# Altium PCB Mixed Signal Board.PcbDoc (part 1 of 3)
Units mm, origin at the board's own origin, x right, y up, seen from the top; angles counter-clockwise.
Board outline 75 x 70 mm, 4 copper layers (Top Layer, GND, VCC, Bottom Layer), stack 1.565 mm thick; 188 components, 143 nets, 738 pads, 413 vias.
Unrouted connection lines stored in the file: 2.
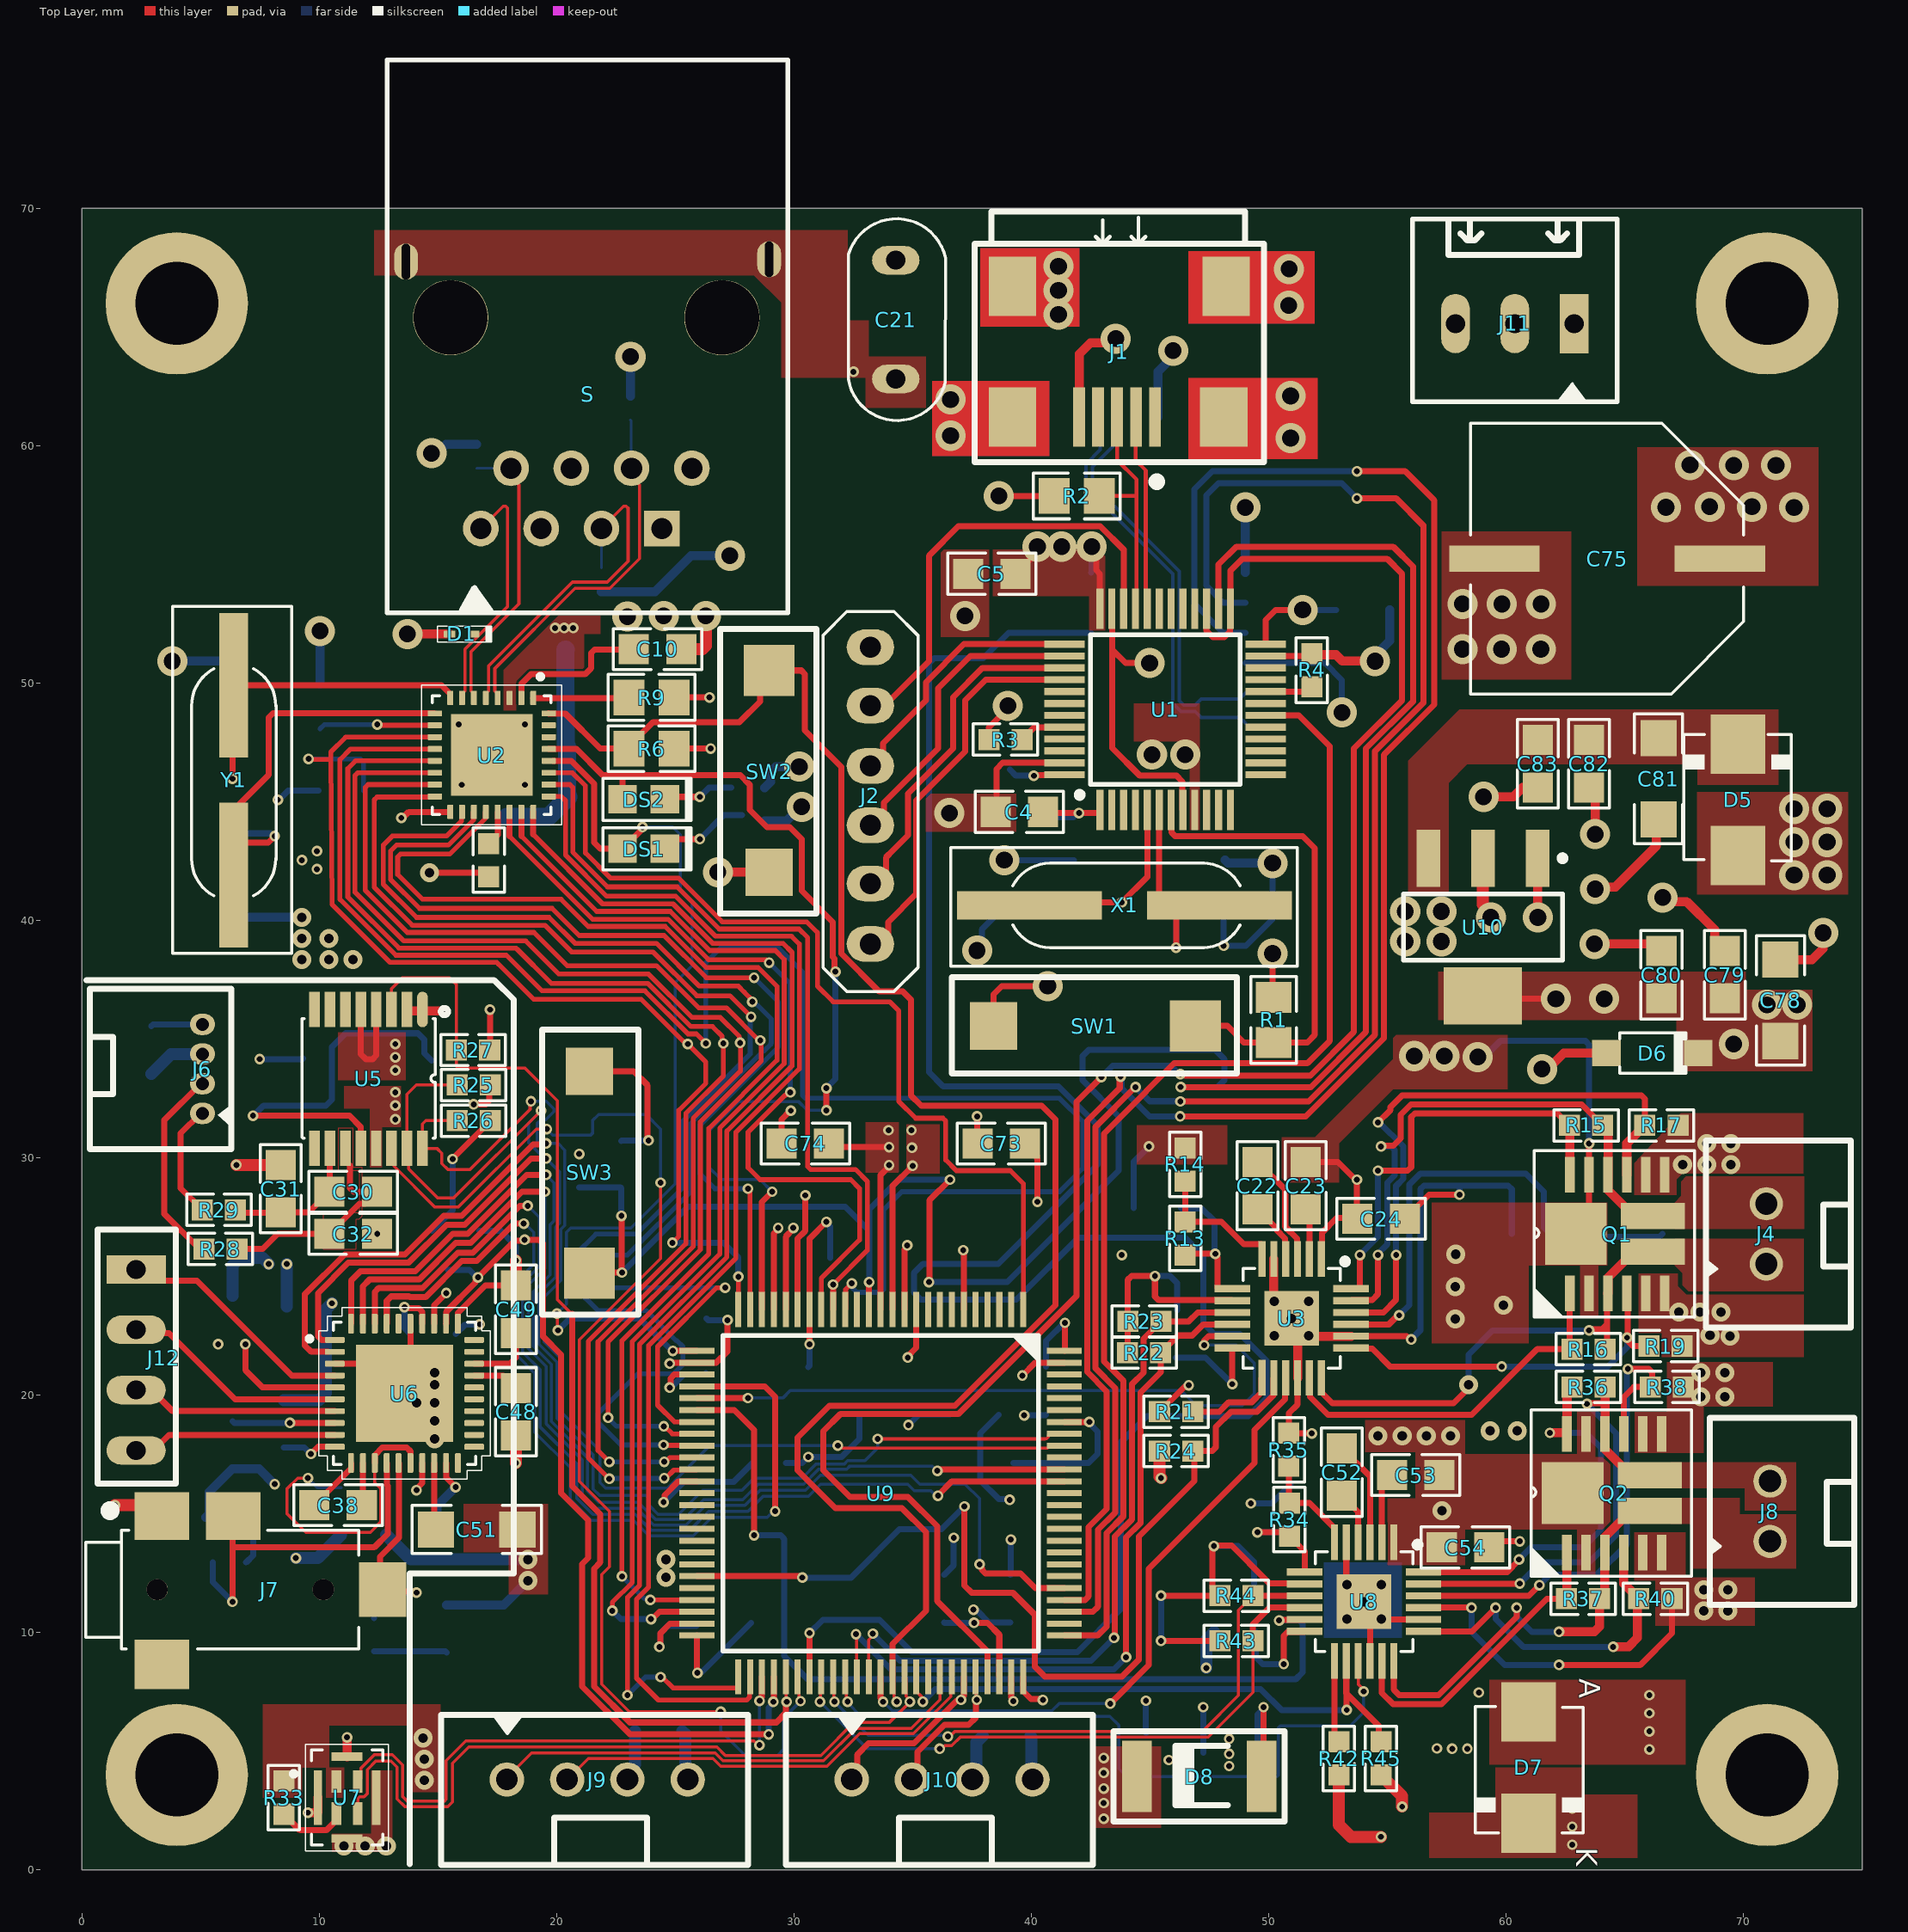
[diagram p0: Top Layer view]
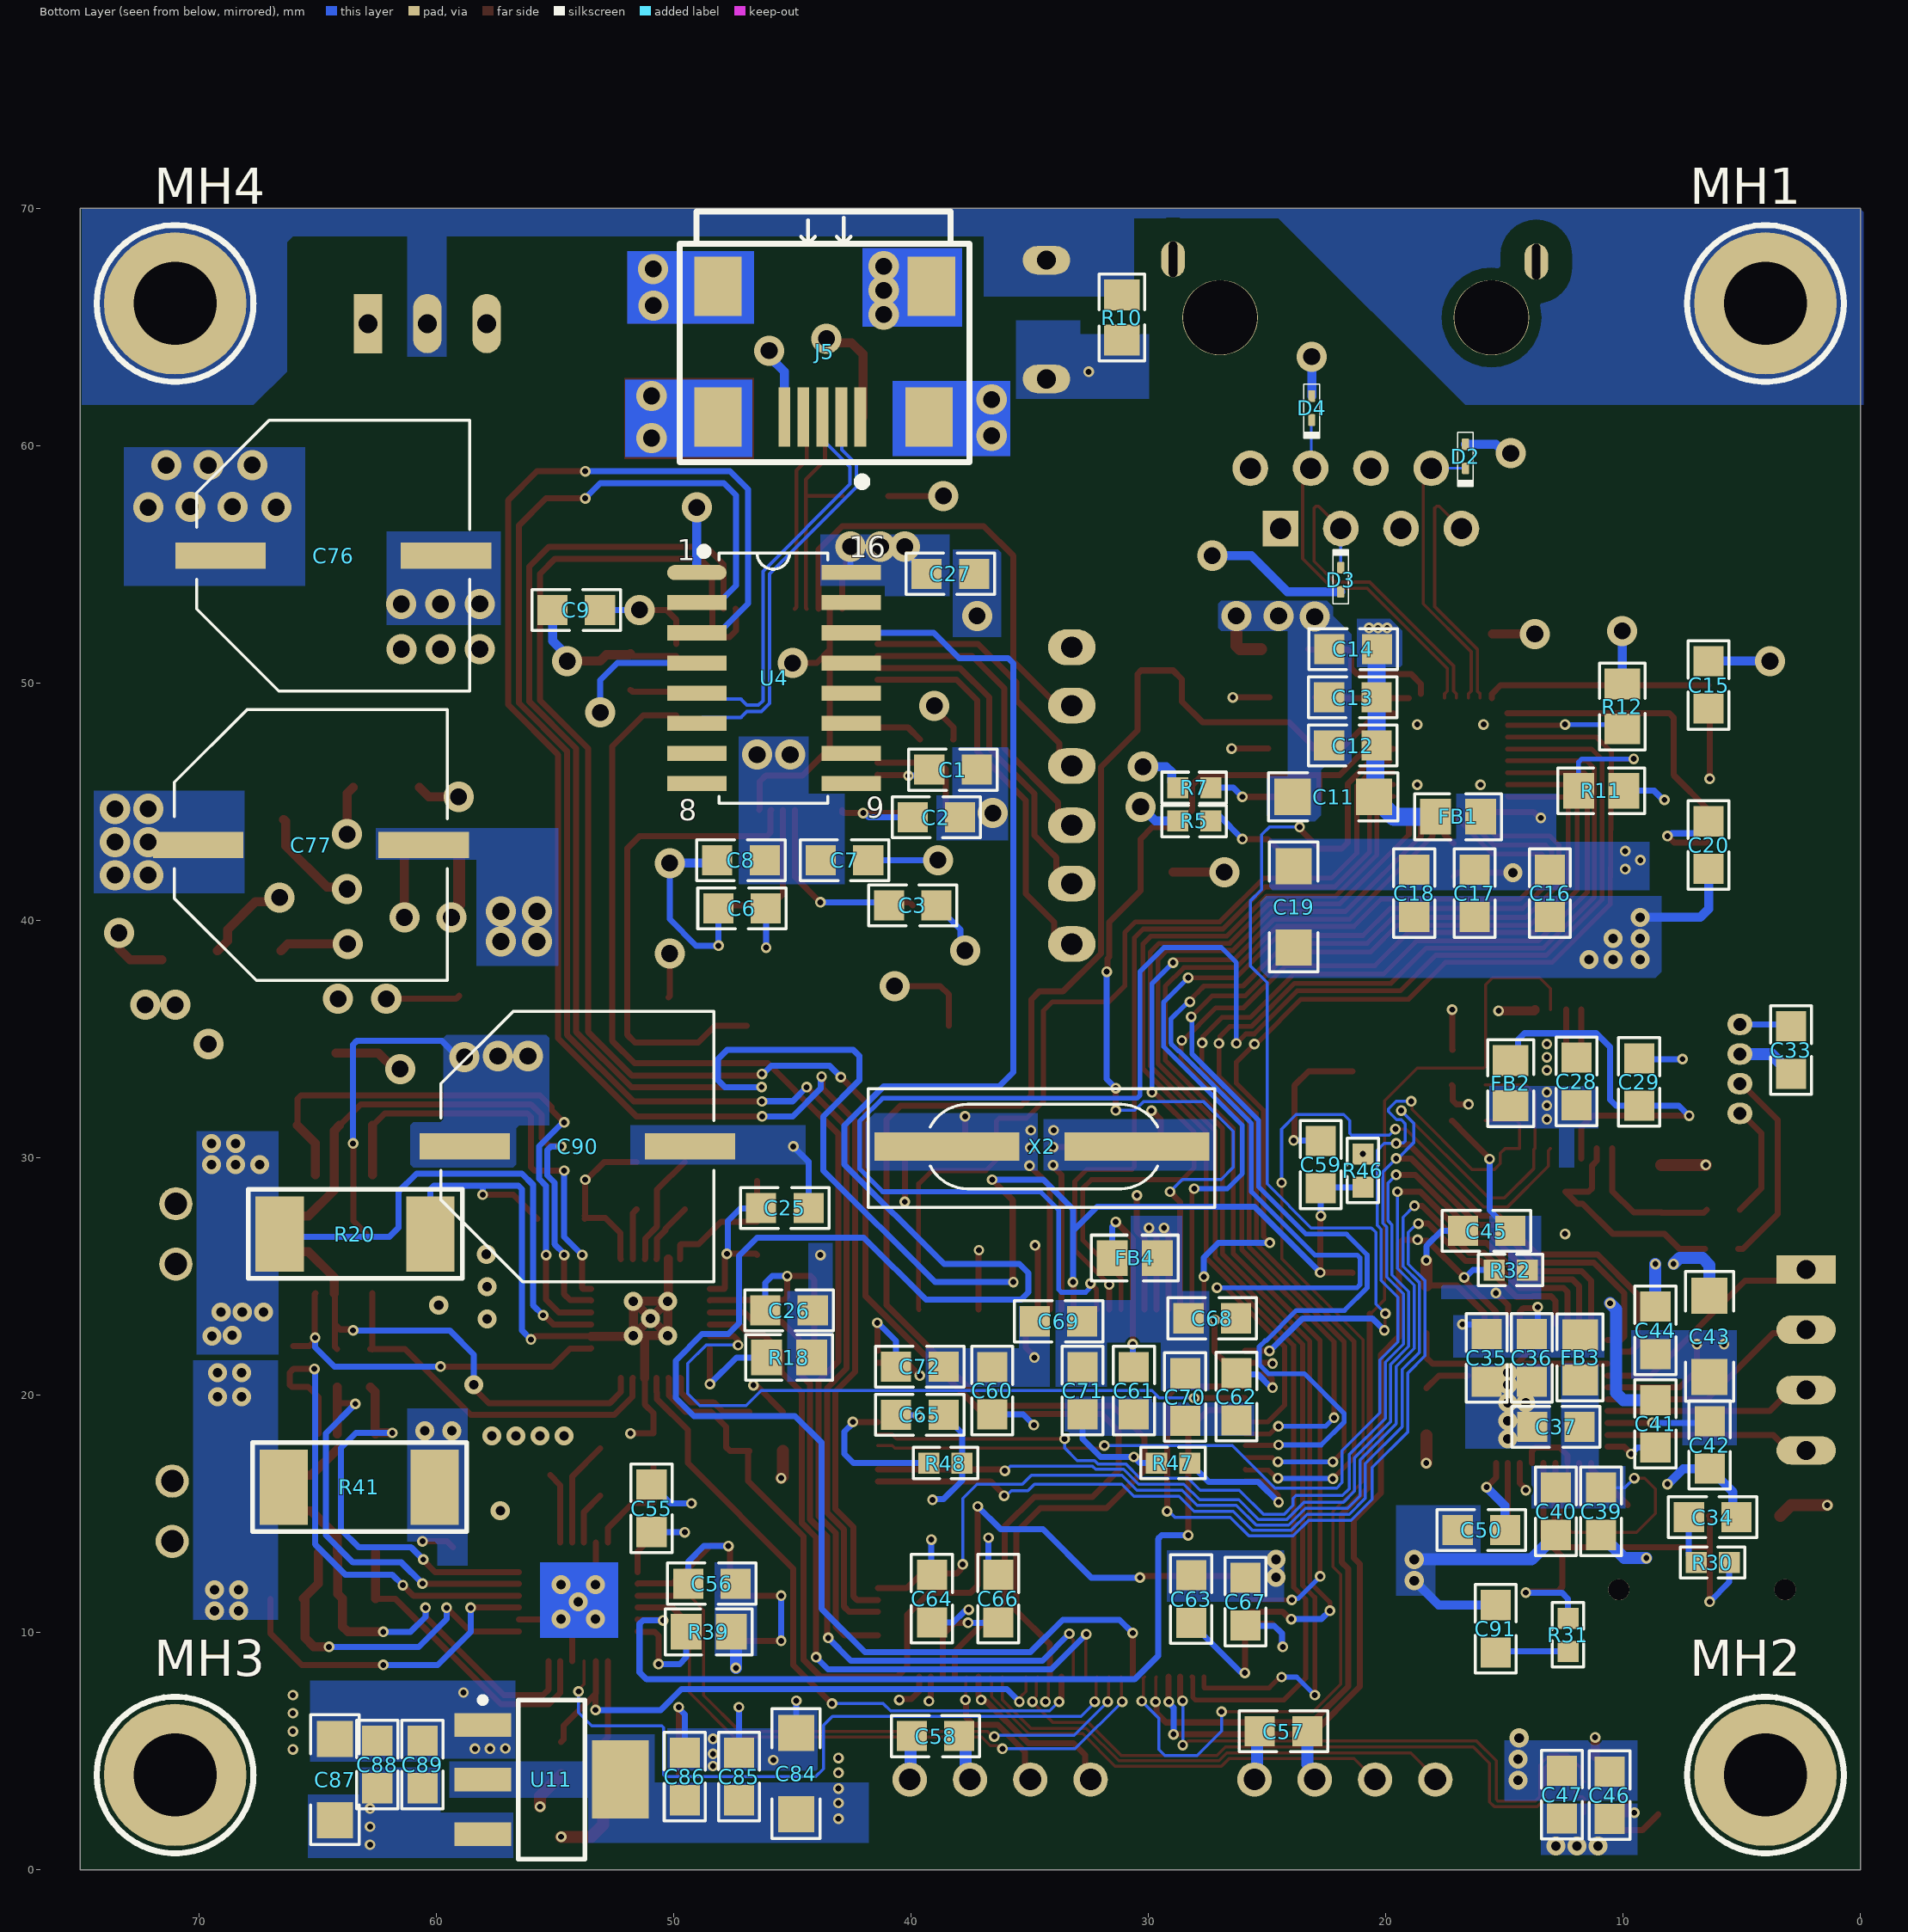
[diagram p1: Bottom Layer view, seen from below]
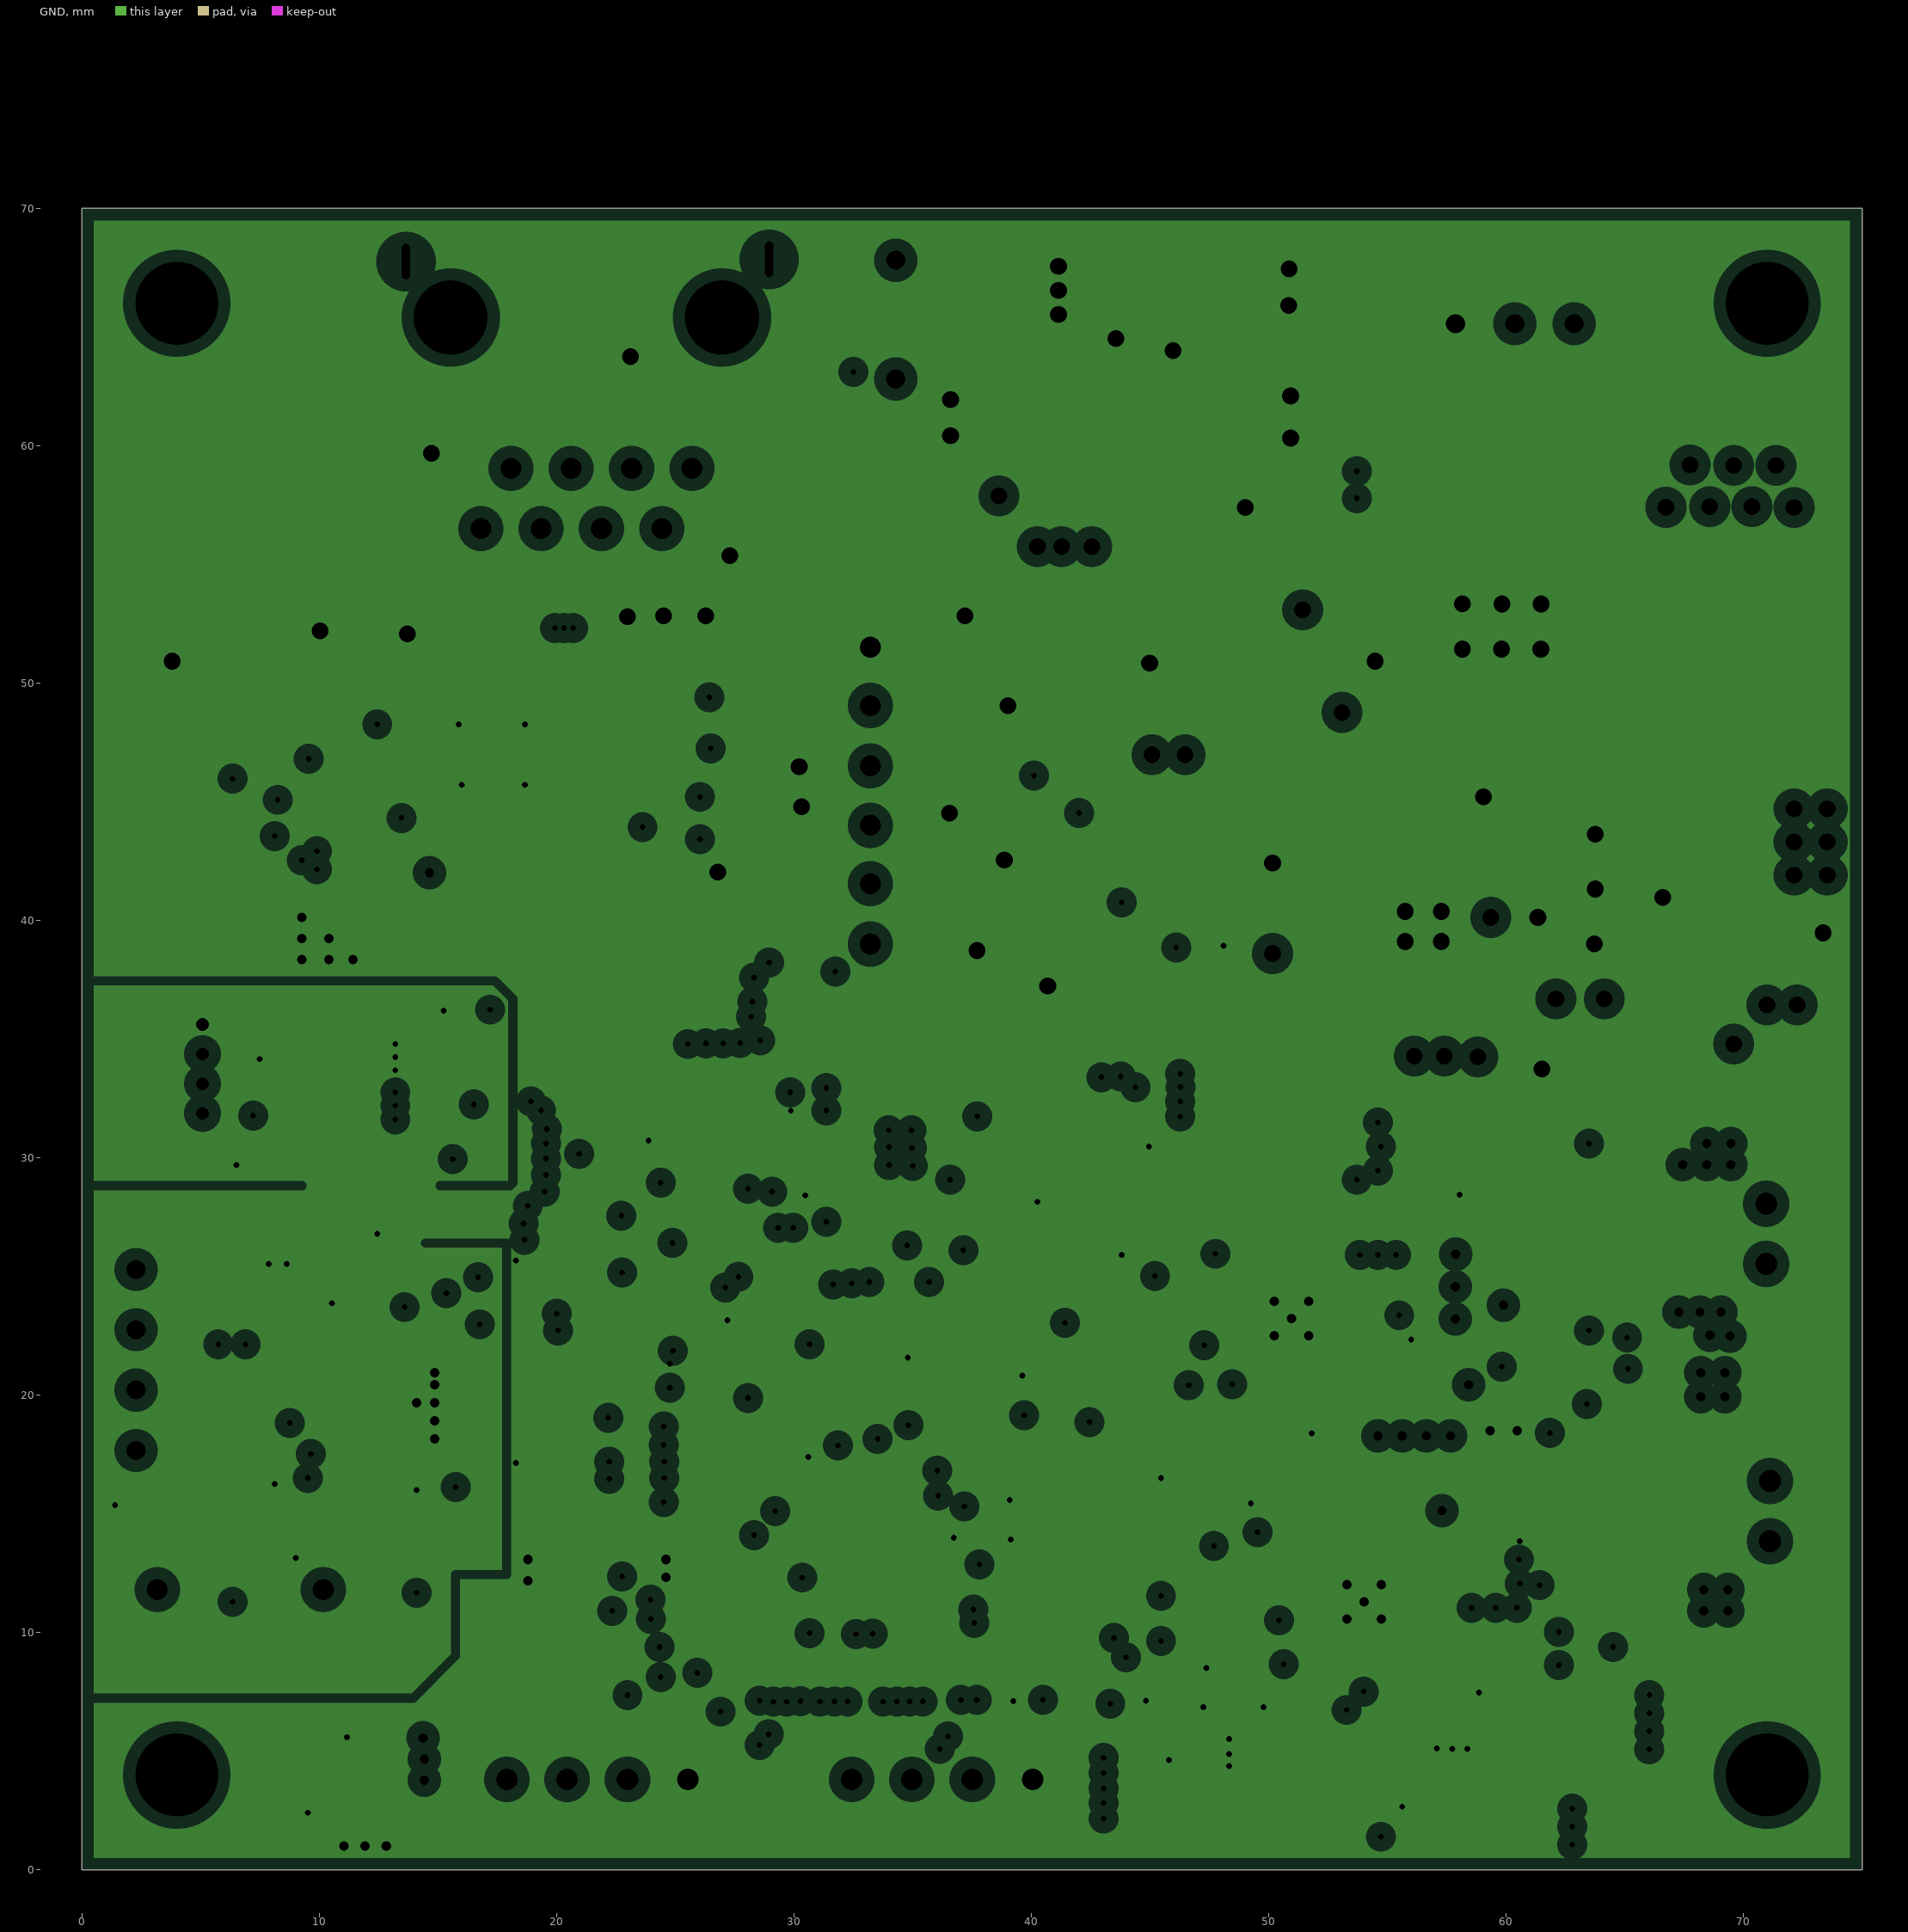
[diagram p2: GND, clearances drawn from the general rule]
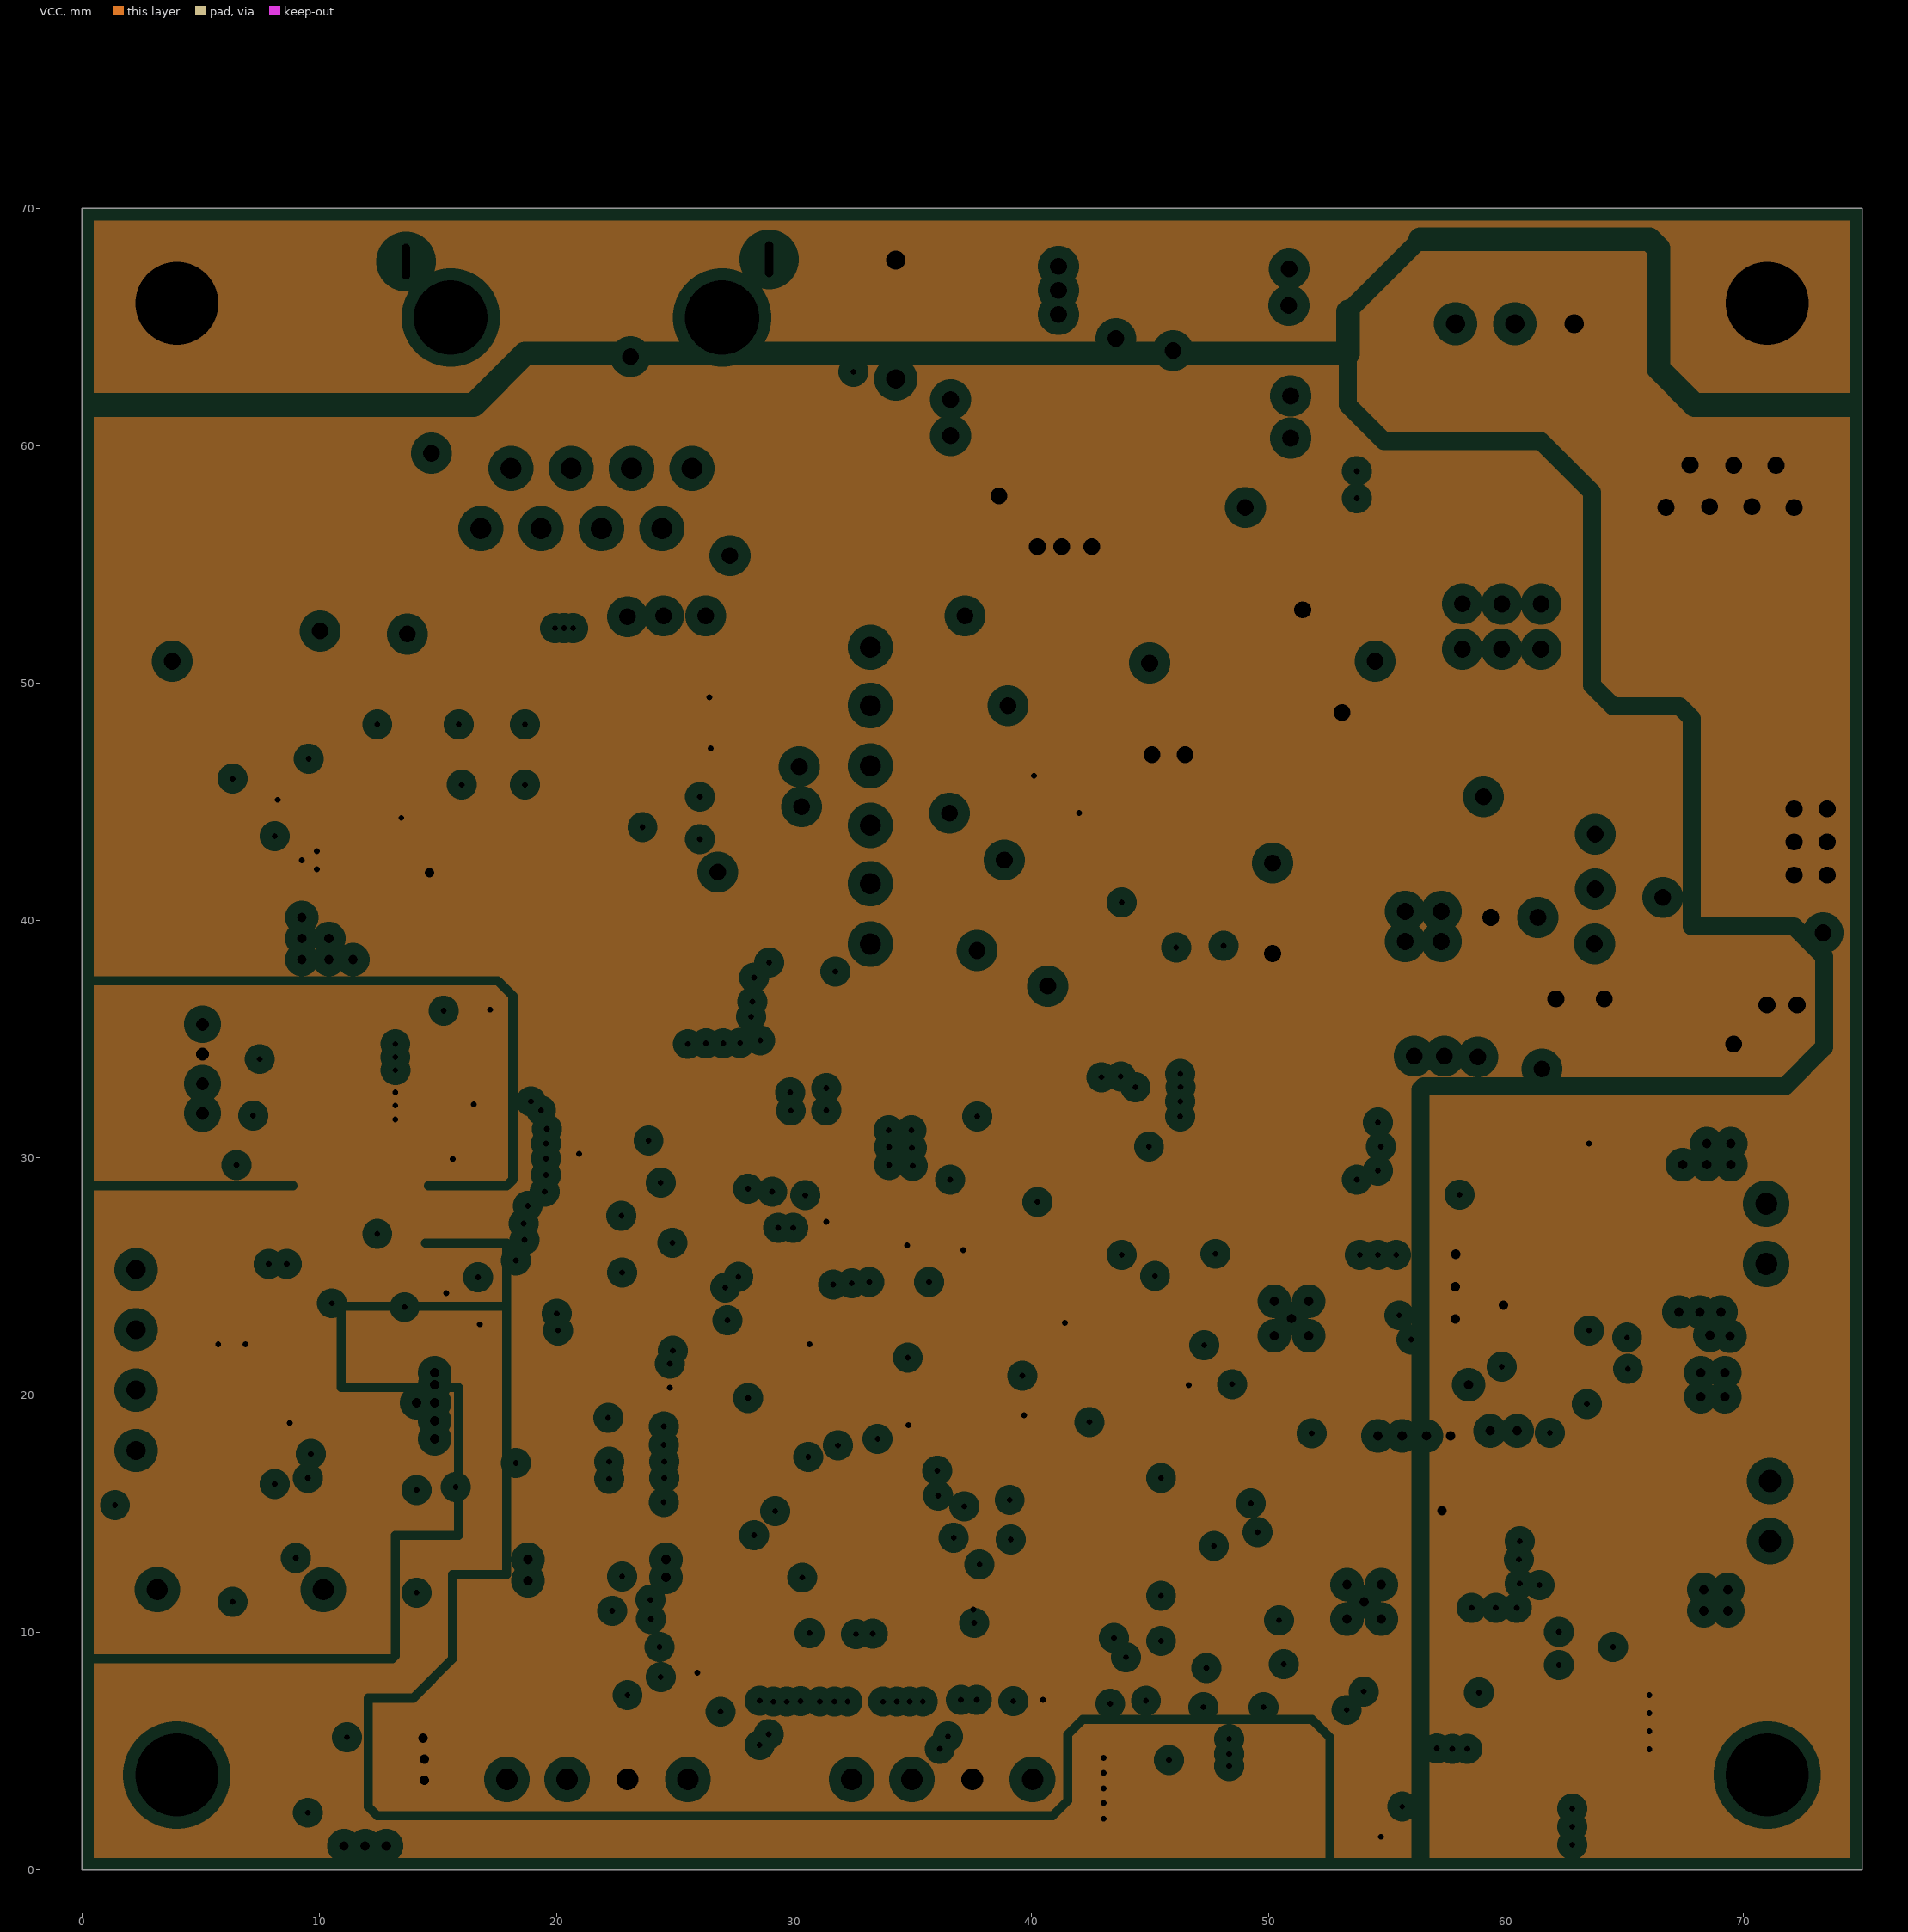
[diagram p3: VCC, clearances drawn from the general rule]
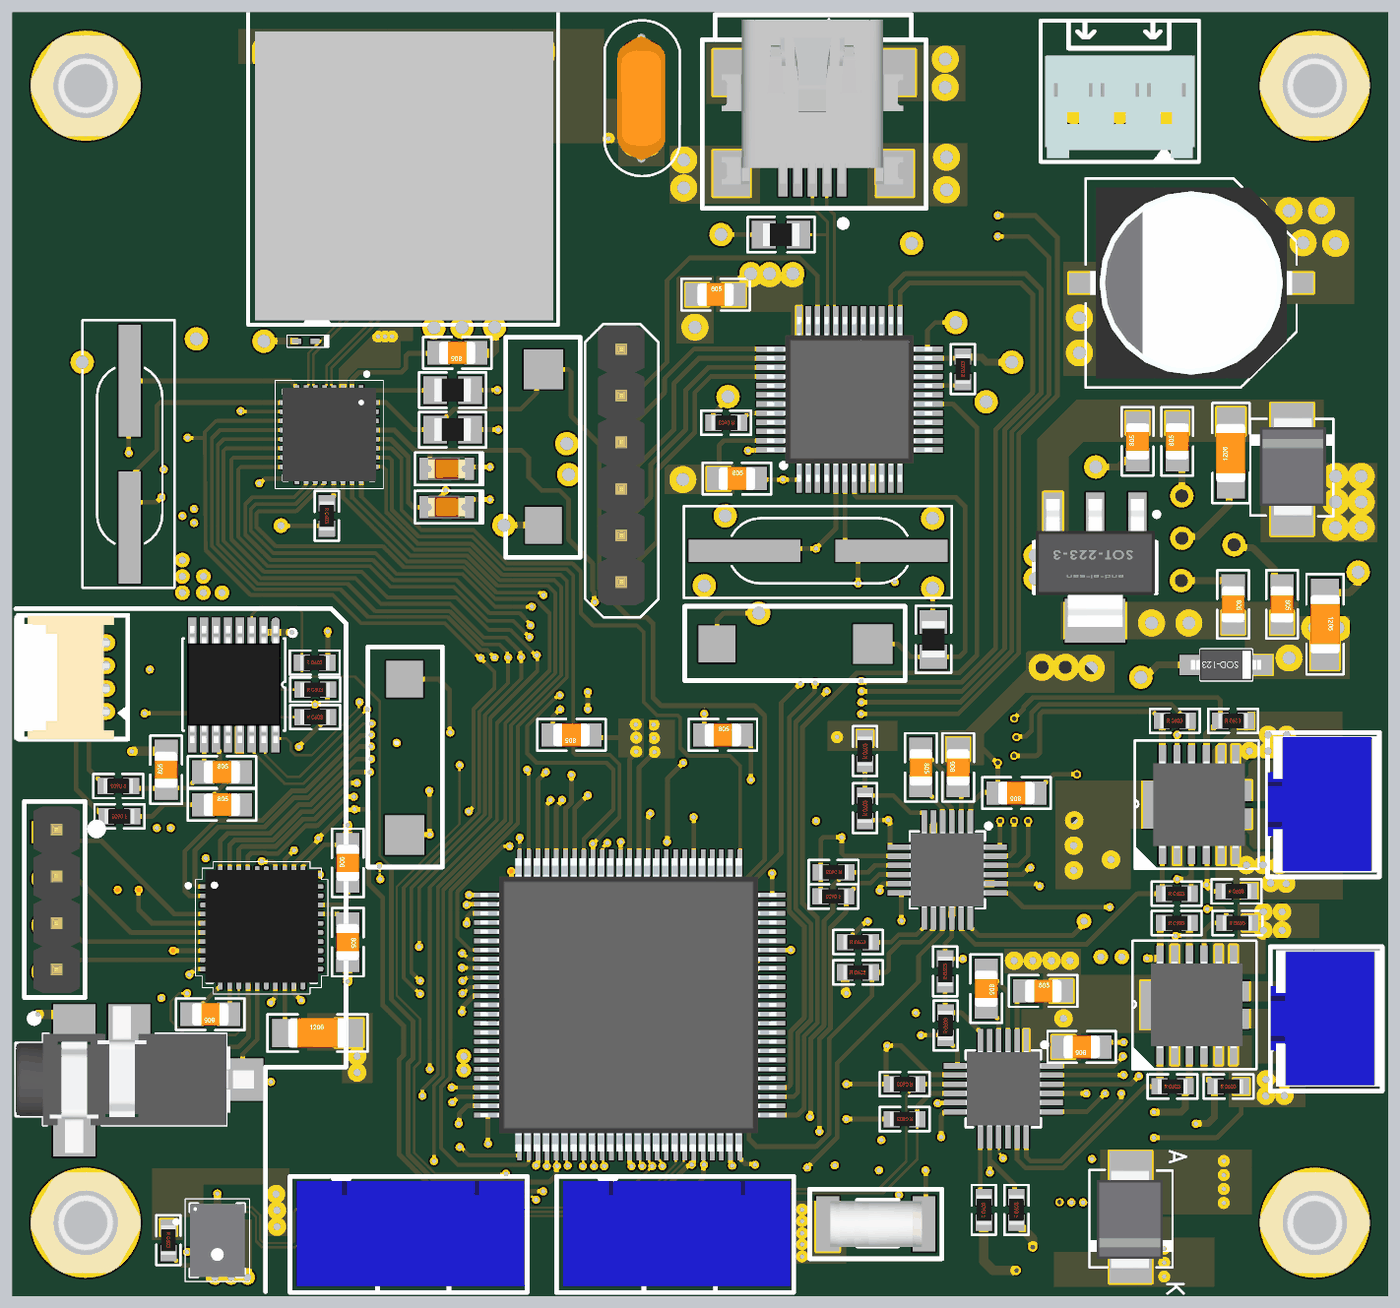
[diagram p6: 3D render of the assembled board from above, using the file's embedded part models]
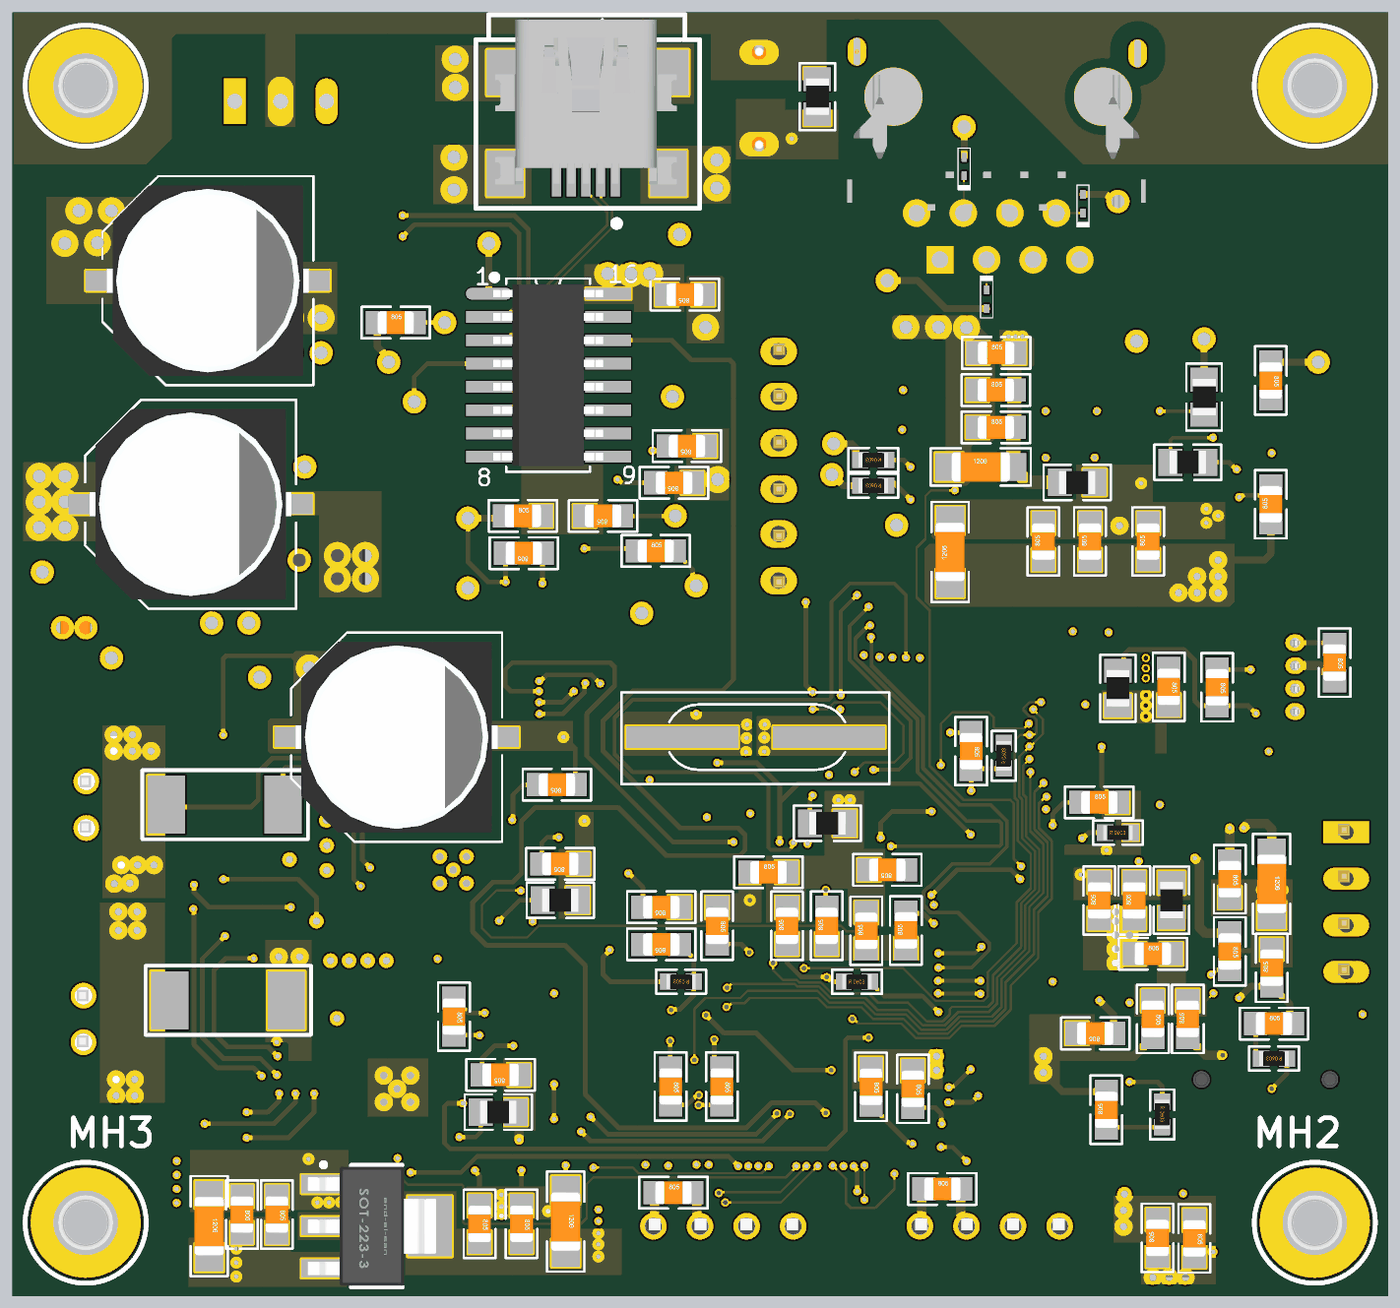
[diagram p7: 3D render of the assembled board from below, using the file's embedded part models]

## Layer stack, top to bottom
Top Solder: solder mask 0.01, Solder Resist, Dk 3.5
Top Layer: signal copper 0.035
Dielectric 2: prepreg 0.1, PP-006, Dk 4.1
GND: plane copper 0.0175, net GND
Dielectric 3: prepreg 1.26, PP-006, Dk 4.1
VCC: plane copper 0.0175, net (Multiple Nets)
Dielectric 1: dielectric 0.1, FR-4, Dk 4.8
Bottom Layer: signal copper 0.035
Bottom Solder: solder mask 0.01, Solder Resist, Dk 3.5

## Board outline
0,70 0,0 75,0 75,70

## Design rules (kind name [scope] priority, off if disabled: settings)
Clearance Clearance_1 [InNet('EARTH') vs InNet('NetC21_2')] p1: gap=1 ignorepadtopadclearanceinfootprint=TRUE
Clearance [InNet('EARTH')] p2: gap=0.5 ignorepadtopadclearanceinfootprint=TRUE
ComponentClearance [All] p1: gap=0.01 collisioncheckmode=3 verticalgap=0.254 showdistances=FALSE
DiffPairsRouting DIFF90 [InDifferentialPairClass('DIFF90')] p1: maxlimit=0.128 minlimit=0.127 mostfreqgap=0.128 toplayer_maxgap=0.127 toplayer_prefgap=0.127 toplayer_minwidth=0.166 toplayer_maxwidth=0.166 toplayer_prefwidth=0.166 bottomlayer_mingap=0.128 bottomlayer_minwidth=0.146 bottomlayer_maxwidth=0.146 bottomlayer_prefwidth=0.146 impedanceprofiledriven=TRUE impedanceprofileid={545CED99-617E-461D-8C4D-E1082A2E9AEE} impedanceprofilevalue=90.000000 maxuncoupledlength=12.7
DiffPairsRouting DIFF100 [InDifferentialPairClass('DIF100')] p2: maxlimit=0.127 minlimit=0.127 mostfreqgap=0.127 toplayer_mingap=0.127 toplayer_minwidth=0.132 toplayer_maxwidth=0.132 toplayer_prefwidth=0.132 bottomlayer_maxgap=0.127 bottomlayer_prefgap=0.127 bottomlayer_minwidth=0.114 bottomlayer_maxwidth=0.114 bottomlayer_prefwidth=0.114 impedanceprofiledriven=TRUE impedanceprofileid={5D373B4F-E4FB-4435-9ADF-C6DEE20937A4} impedanceprofilevalue=100.000000 maxuncoupledlength=12.7
PlaneClearance [All] p1: clearance=0.508
PlaneConnect [All] p1: planeconnectstyle=Relief reliefexpansion=0.508 reliefentries=4 reliefconductorwidth=0.254 reliefairgap=0.254
PolygonConnect [All] p1: connectstyle=Direct reliefconductorwidth=0.254 reliefentries=4 polygonreliefangle="90 Angle" airgapwidth=0.254
RoutingVias [All] p1: holewidth=0.711 width=1.27 viastyle="Through Hole" minholewidth=0.25 minwidth=0.45 maxholewidth=0.711 maxwidth=1.27
SolderMaskExpansion [All] p1: expansion=0.102 istentingtop=FALSE
SupplyNets "Schematic Supply Nets_7" [InNet('GND')] p1: voltage=0.000
SupplyNets "Schematic Supply Nets_6" [InNet('+1V8')] p2: voltage=0.000
SupplyNets "Schematic Supply Nets_5" [InNet('+3V3')] p3: voltage=0.000
SupplyNets "Schematic Supply Nets_4" [InNet('DVDD')] p4: voltage=0.000
SupplyNets "Schematic Supply Nets_3" [InNet('+12V')] p5: voltage=0.000
SupplyNets "Schematic Supply Nets_1" [InNet('EARTH')] p6: voltage=0.000
SupplyNets "Schematic Supply Nets" [InNet('DVDD_2')] p7: voltage=0.000
Width [All] p1: maxlimit=5 minlimit=0.1 preferedwidth=0.254 minimp=50.000000 maximp=50.000000 favimp=50.000000
26 further rules are at their usual default settings.

## Classes and differential pairs
net class OSC_Nets: NetC73_1 NetC74_1 NetU9_8
differential pair class DIFF90: CH340USB_D USBD
differential pair class DIF100: RD TD
net class 50OHM: COL CRS INT MDC MDIO RX_CLK RX_D0 RX_D1 RX_D2 RX_D3 RX_DV RX_ER TX_CLK TX_D0 TX_D1 TX_D2 TX_D3 TX_EN
component class "UART to TTL": C27 J5 U4
component class STM32F407: C57 C58 C59 C60 C61 C62 C63 C64 C65 C66 C67 C68 C69 C70 C71 C72 C73 C74 FB4 J9 J10 R46 R47 R48 SW3 U9 X2
component class STM32F103: C1 C2 C3 C4 C5 C6 C7 C8 C9 J1 J2 R1 R2 R3 R4 SW1 U1 X1
component class "Power and Regulator": C75 C76 C77 C78 C79 C80 C81 C82 C83 C84 C85 C86 C87 C88 C89 D5 D6 D7 J11 MH1 MH2 MH3 MH4 U10 U11
component class "Motor Driver": C22 C23 C24 C25 C26 C90 J4 Q1 R13 R14 R15 R16 R17 R18 R19 R20 R21 R22 R23 R24 U3
component class "Motor Driver_2": C52 C53 C54 C55 C56 J8 Q2 R34 R35 R36 R37 R38 R39 R40 R41 R42 R43 R44 R45 U8
component class "Ethernet PHY": C10 C11 C12 C13 C14 C15 C16 C17 C18 C19 C20 C21 D1 D2 D3 D4 DS1 DS2 FB1 R5 R6 R7 R9 R10 R11 R12 SW2 U2 Y1
component class DAC_MIC: C34 C35 C36 C37 C38 C39 C40 C41 C42 C43 C44 C45 C46 C47 C48 C49 C50 C51 C91 FB3 J7 J12 R30 R31 R32 R33 U6 U7
component class ADC: C28 C29 C30 C31 C32 C33 FB2 J6 R25 R26 R27 R28 R29 U5
differential pair USBD: +USBD_P -USBD_N
differential pair TD: +TD_P -TD_N
differential pair RD: +RD_P -RD_N
differential pair CH340USB_D: +CH340USB_D_P -CH340USB_D_N

## Components (designator, comment, footprint, x,y, rotation, side; value= is the part's Value field where it differs from the comment)
C1 "4.7uF" CAP_0805 38.227,46.355 r0 bottom
C2 "0.1uF" CAP_0805 38.929,44.348 r0 bottom
C3 "30pF" CAP_0805 39.925,40.64 r180 bottom
C4 "0.1uF" CAP_0805 39.497,44.577 r0 top
C5 "0.1uF" CAP_0805 38.338,54.61 r0 top
C6 "30pF" CAP_0805 47.117,40.513 r0 bottom
C7 "1uF" CAP_0805 42.799,42.545 r0 bottom
C8 "10nF" CAP_0805 47.163,42.545 r180 bottom
C9 "0.1uF" CAP_0805 54.102,53.086 r180 bottom
C10 "2nF" CAP_0805 24.257,51.435 r180 top
C11 "10uF" CAP_1206 22.209,45.217 r180 bottom
C12 "1uF" CAP_0805 21.383,47.371 r180 bottom
C13 "0.1uF" CAP_0805 21.383,49.403 r180 bottom
C14 "10nF" CAP_0805 21.367,51.435 r180 bottom
C15 "20pF" CAP_0805 6.397,49.927 r270 bottom
C16 "10nF" CAP_0805 13.081,41.148 r90 bottom
C17 "0.1uF" CAP_0805 16.256,41.148 r90 bottom
C18 "1uF" CAP_0805 18.796,41.148 r90 bottom
C19 "10uF" CAP_1206 23.881,40.576 r90 bottom
C20 "20pF" CAP_0805 6.397,43.18 r90 bottom
C21 "10nF" CAP_P196_102X287_H332_RAD_TH 34.29,67.818 r270 top
C22 "0.1uF" CAP_0805 49.53,28.829 r270 top
C23 "1uF" CAP_0805 51.562,28.829 r90 top
C24 "0.1uF" CAP_0805 54.737,27.432 r180 top
C25 "1uF" CAP_0805 45.314,27.889 r0 bottom
C26 "1uF" CAP_0805 45.136,23.571 r0 bottom
C27 "0.1uF" CAP_0805 38.338,54.61 r0 bottom
C28 "0.1uF" CAP_0805 11.963,33.223 r270 bottom
C29 "0.1uF" CAP_0805 9.322,33.198 r270 bottom
C30 "0.1uF" CAP_0805 11.43,28.575 r0 top
C31 "10nF" CAP_0805 8.382,28.702 r90 top
C32 "10nF" CAP_0805 11.43,26.797 r0 top
C33 "0.1uF" CAP_0805 2.921,34.544 r270 bottom
C34 "22nF" CAP_0805 6.223,14.859 r180 bottom
C35 "1uF" CAP_0805 15.748,21.574 r90 bottom
C36 "0.1uF" CAP_0805 13.843,21.574 r90 bottom
C37 "0.1uF" CAP_0805 12.827,18.669 r180 bottom
C38 "1uF" CAP_0805 10.795,15.367 r180 top
C39 "0.1uF" CAP_0805 10.922,15.113 r90 bottom
C40 "1uF" CAP_0805 12.827,15.113 r270 bottom
C41 "1uF" CAP_0805 8.636,18.796 r270 bottom
C42 "0.1uF" CAP_0805 6.35,17.907 r90 bottom
C43 "10uF" CAP_1206 6.35,22.479 r270 bottom
C44 "0.1uF" CAP_0805 8.636,22.733 r270 bottom
C45 "0.1uF" CAP_0805 15.748,26.924 r180 bottom
C46 "1uF" CAP_0805 10.566,3.15 r270 bottom
C47 "0.1uF" CAP_0805 12.573,3.175 r90 bottom
C48 "150pF" CAP_0805 18.288,19.304 r270 top
C49 "150pF" CAP_0805 18.288,23.622 r90 top
C50 "1uF" CAP_0805 15.967,14.326 r0 bottom
C51 "10uF" CAP_1206 16.637,14.351 r0 top
C52 "0.1uF" CAP_0805 53.086,16.764 r270 top
C53 "1uF" CAP_0805 56.197,16.637 r0 top
C54 "0.1uF" CAP_0805 58.293,13.589 r180 top
C55 "1uF" CAP_0805 50.927,15.24 r270 bottom
C56 "1uF" CAP_0805 48.387,12.065 r0 bottom
C57 "0.1uF" CAP_0805 24.304,5.842 r180 bottom
C58 "0.1uF" CAP_0805 38.964,5.639 r180 bottom
C59 "0.1uF" CAP_0805 22.733,29.718 r270 bottom
C60 "4.7uF" CAP_0805 36.576,20.193 r270 bottom
C61 "0.1uF" CAP_0805 30.607,20.193 r90 bottom
C62 "0.1uF" CAP_0805 26.289,19.939 r90 bottom
C63 "0.1uF" CAP_0805 28.194,11.414 r270 bottom
C64 "0.1uF" CAP_0805 39.116,11.43 r270 bottom
C65 "0.1uF" CAP_0805 39.624,19.177 r0 bottom
C66 "2.2uF" CAP_0805 36.322,11.43 r270 bottom
C67 "2.2uF" CAP_0805 25.908,11.303 r270 bottom
C68 "1uF" CAP_0805 27.305,23.241 r0 bottom
C69 "1uF" CAP_0805 33.782,23.114 r180 bottom
C70 "0.1uF" CAP_0805 28.448,19.923 r90 bottom
C71 "0.1uF" CAP_0805 32.766,20.193 r90 bottom
C72 "0.1uF" CAP_0805 39.624,21.209 r0 bottom
C73 "30pF" CAP_0805 38.735,30.607 r0 top
C74 "30pF" CAP_0805 30.48,30.607 r180 top
C75 "100uF" ACAP_P305_D393_H393_RAD 64.262,55.245 r180 top
C76 "100uF" ACAP_P305_D393_H393_RAD 64.338,55.372 r180 bottom
C77 "100uF" ACAP_P305_D393_H393_RAD 65.278,43.18 r180 bottom
C78 "10uF" CAP_1206 71.564,36.639 r270 top
C79 "1uF" CAP_0805 69.215,37.719 r270 top
C80 "0.1uF" CAP_0805 66.548,37.719 r270 top
C81 "10uF" CAP_1206 66.421,45.974 r90 top
C82 "1uF" CAP_0805 63.5,46.609 r90 top
C83 "0.1uF" CAP_0805 61.341,46.609 r90 top
C84 "10uF" CAP_1206 44.831,4.064 r270 bottom
C85 "1uF" CAP_0805 47.244,3.937 r270 bottom
C86 "0.1uF" CAP_0805 49.53,3.937 r270 bottom
C87 "10uF" CAP_1206 64.262,3.81 r270 bottom
C88 "1uF" CAP_0805 62.484,4.445 r270 bottom
C89 "0.1uF" CAP_0805 60.579,4.445 r270 bottom
C90 "100uF" ACAP_P305_D393_H393_RAD 54.051,30.48 r180 bottom
C91 "22nF" CAP_0805 15.367,10.16 r90 bottom
D1 "ESD3V3D9-TP" DIO_SOD-923 15.999,52.07 r180 top
D2 "ESD3V3D9-TP" DIO_SOD-923 16.637,59.563 r90 bottom
D3 "ESD3V3D9-TP" DIO_SOD-923 21.891,54.356 r270 bottom
D4 "ESD3V3D9-TP" DIO_SOD-923 23.114,61.592 r90 bottom
D5 "MBRS130LT3G" DIO_SMB_DO-214AA 69.77,45.085 r90 top
D6 "BZT52C3V3-7-F" DIO_SOD-123 66.167,34.417 r0 top
D7 "MBRS130LT3G" DIO_SMB_DO-214AA 60.96,4.318 r270 top
D8 "1.8V Zener" DIO_DO-213AB_SMD 47.075,3.937 r0 top
DS1 "RED LED" LED_0805 23.673,43.028 r180 top
DS2 "RED LED" LED_0805 23.673,45.11 r180 top
FB1 "1K" IND_0805 16.953,44.374 r180 bottom
FB2 "1K" IND_0805 14.732,33.147 r270 bottom
FB3 "1K" IND_0805 11.811,21.59 r90 bottom
FB4 "1K" IND_0805 30.571,25.781 r0 bottom
J1 "USB2.0 MINI B" CON_690-005-299-043 39.212,61.214 r270 top
J2 "Bergstrip 2.54mm" CON6_100_59D78_TH_ST 33.223,39.014 r90 top
J4 "B2B-XH-A(LF)(SN)" CON2_100_B2B-XH-A_TH_ST 70.968,25.527 r90 top
J5 "USB2.0 MINI B" CON_690-005-299-043 48.133,61.214 r270 bottom
J6 "1.25MM Spade 4PIN" CON4_50_653004117322_TH_RA 5.08,35.627 r90 top
J7 "4X1 STEREO" CON_SJ-2504A-SMT-TR_SMD 6.675,11.811 r0 top
J8 "B2B-XH-A(LF)(SN)" CON2_100_B2B-XH-A_TH_ST 71.12,13.843 r90 top
J9 "B4B-XH-A(LF)(SN)" CON4_100_B4B-XH-A_TH_ST 17.907,3.81 r0 top
J10 "B4B-XH-A(LF)(SN)" CON4_100_B4B-XH-A_TH_ST 32.432,3.81 r0 top
J11 "Terminal Block 2.5mm" CON3_100_TB_TH_ST 60.372,65.151 r270 top
J12 "4X1 BERG STRIP" CON4_100_40D72_TH_ST_MALE 2.286,25.298 r0 top
MH1 "Mounting Hole" MOUNTING 4,66 r180 bottom
MH2 "Mounting Hole" MOUNTING 4,4 r180 bottom
MH3 "Mounting Hole" MOUNTING 71,4 r180 bottom
MH4 "Mounting Hole" MOUNTING 71,66 r180 bottom
Q1 "DMHT6016LFJ-13" DFN5045-12_33_212_27X15_SMD_1 64.69,26.797 r0 top
Q2 "DMHT6016LFJ-13" DFN5045-12_33_212_27X15_SMD_1 64.563,15.875 r0 top
R1 "10K" RES_0805 50.212,35.814 r270 top
R2 "1.5K" RES_0805 41.91,57.887 r0 top
R3 "100K" RES_0603 38.913,47.625 r180 top
R4 "100K" RES_0603 51.816,50.546 r90 top
R5 "3K3" RES_0603 28.067,44.196 r0 bottom
R6 "10K" RES_0805 24.003,47.244 r180 top
R7 "3K3" RES_0603 28.067,45.593 r0 bottom
R8 "10K" RES_0603 17.145,42.545 r270 top
R9 "10K" RES_0805 24.003,49.403 r180 top
R10 "1M" RES_0805 31.115,65.405 r90 bottom
R11 "10K" RES_0805 10.922,45.466 r0 bottom
R12 "6.49K" RES_0805 10.033,49.022 r90 bottom
R13 "2K2" RES_0603 46.482,26.606 r90 top
R14 "3K3" RES_0603 46.482,29.718 r90 top
R15 "10K" RES_0603 63.373,31.369 r0 top
R16 "10K" RES_0603 63.475,21.946 r0 top
R17 "10K" RES_0603 66.548,31.369 r0 top
R18 "33K" RES_0805 45.132,21.59 r180 bottom
R19 "10K" RES_0603 66.726,22.073 r0 top
R20 "50mOHM" RES_2512 63.42,26.797 r0 bottom
R21 "10K" RES_0603 46.101,19.304 r0 top
R22 "10K" RES_0603 44.755,21.793 r180 top
R23 "10K" RES_0603 44.768,23.114 r180 top
R24 "10K" RES_0603 46.101,17.653 r0 top
R25 "10K" RES_0603 16.51,33.071 r0 top
R26 "10K" RES_0603 16.51,31.572 r0 top
R27 "100K" RES_0603 16.485,34.544 r0 top
R28 "1K" RES_0603 5.842,26.162 r180 top
R29 "1K" RES_0603 5.779,27.813 r180 top
R30 "51.1R" RES_0603 6.223,12.954 r0 bottom
R31 "51.1R" RES_0603 12.319,9.906 r270 bottom
R32 "10K" RES_0603 14.732,25.273 r180 bottom
R33 "10K" RES_0603 8.509,3.048 r270 top
R34 "2K2" RES_0603 50.876,14.757 r90 top
R35 "3K3" RES_0603 50.851,17.704 r90 top
R36 "10K" RES_0603 63.475,20.345 r0 top
R37 "10K" RES_0603 63.246,11.43 r0 top
R38 "10K" RES_0603 66.777,20.345 r0 top
R39 "33K" RES_0805 48.514,10.033 r180 bottom
R40 "10K" RES_0603 66.294,11.43 r0 top
R41 "50mOHM" RES_2512 63.246,16.129 r0 bottom
R42 "10K" RES_0603 52.959,4.699 r90 top
R43 "10K" RES_0603 48.641,9.652 r180 top
R44 "10K" RES_0603 48.641,11.557 r180 top
R45 "10K" RES_0603 54.737,4.699 r90 top
R46 "10K" RES_0603 20.955,29.464 r90 bottom
R47 "100K" RES_0603 28.956,17.145 r180 bottom
R48 "100K" RES_0603 38.544,17.145 r0 bottom
S "RJ45 LAN" CON10_P106_RJ45_TH_ST 26.956,65.46 r180 top (schematic designator J3)
SW1 "TACTILE SWITCH" SW_342_SMD 38.41,35.56 r180 top
SW2 "TACTILE SWITCH" SW_342_SMD 28.956,42.037 r270 top
SW3 "TACTILE SWITCH" SW_342_SMD 21.387,33.646 r90 top
U1 "STM32F103C8T6" LQFP-48_19.6_393_58X11_SMD 45.64,48.895 r90 top
U2 "DP83826IRHBR" VQFN32_19_218_23X9_SMD 17.269,46.977 r270 top
U3 "DRV8701ERGET" VFQFN24_19.6_196_12X32_SMD_1 48.967,24.487 r270 top
U4 "CH340C" SOIC16_50_284_25X90_SMT 45.771,50.241 r180 bottom
U5 "ADS122C04IPW" TSSOP16_25-59_294_54X14_SMT 12.078,33.346 r270 top
U6 "CS43L22-CNZ" QFN40_19_284_33X9_SMD 13.593,20.08 r0 top
U7 "IMP34DT05TR" HCLGA-4_53_137_15X37_SMD 11.176,3.048 r0 top
U8 "DRV8701ERGET" VFQFN24_19.6_196_12X32_SMD_1 52.022,12.553 r270 top
U9 "STM32F407VGT6" QFN100_19.6_669_58X10_SMD 33.528,15.875 r270 top
U10 "LD1117S33CTR" SOT223_3 59.055,39.751 r270 top
U11 "LD1117S18TR" SOT223_3 55.164,3.835 r180 bottom
X1 "8Mhz" XTAL_314_240X47_SMD 47.925,40.64 r180 top
X2 "8Mhz" XTAL_314_240X47_SMD 30.481,30.48 r0 bottom
Y1 "25Mhz -14mm" XTAL_314_240X47_SMD 6.397,41.911 r90 top

## Footprints (in the part's own frame and the unit in brackets; to place one, negate y for a bottom-side part, rotate by r counter-clockwise, add the part's x,y. Pads: shape width x height; smd on the part's side, far side on the other; paste and mask are expansions set on the pad)
ACAP_P305_D393_H393_RAD [mm] "Aluminium Capacitor"
  rect 3.81x1.1 smd: 1(-4.75,0) 2(4.75,0)
  silkscreen extent -5.75,-5.7 5.75,5.7, body extent -5.5,-5.2 5.5,5.2, height 10.41
CAP_0805 [mm] "Ceramic Capacitor"
  rect 1.27x1.27 smd mask+0.076: 1(-1,0) 2(1,0)
  silkscreen extent -1.86,-0.86 1.86,0.86, body extent -1,-0.62 1,0.63, height 0.78
CAP_1206 [mil] "Ceramic Capacitor"
  rect 60x60 smd: 1(-67.49,-0.2) 2(67.51,-0.2)
  silkscreen extent -107,-40 108,40, body extent -63,-31 63,32, height 39
CAP_P196_102X287_H332_RAD_TH [mm] "Y1 CAP, TROUGH HOLE"
  oval 1.2x2 hole 0.8 mask+0.076: 1(0,0) 2(5,0)
  silkscreen extent -1.75,-2 6.75,2.1, body extent -1.04,-1.3 6.04,1.3, height 9.14
CON2_100_B2B-XH-A_TH_ST [mm] "Connector Header"
  round 1.4 hole 0.94: 1(0,0) 2(2.54,0)
  silkscreen extent -2.67,-3.56 5.21,2.54, body extent -2.41,-3.5 5.01,2.54, height 8.44
CON3_100_TB_TH_ST [mm]
  rect 2.5x1.2 hole 0.8: 1(0,2.5)
  oval 2.5x1.2 hole 0.8: 2(0,0) 3(0,-2.5)
  silkscreen extent -4.4,-4.32 3.3,4.32, body extent -2.5,-4.07 3.1,4.07, height 12.86
CON4_50_653004117322_TH_RA [mm] "wurth connector"
  oval 0.9x1.05 hole 0.55: 1(-3.75,0) 2(-2.5,0) 3(-1.25,0) 4(0,0)
  silkscreen extent -5.25,-1.34 1.5,4.75, body extent -5.27,-0.45 1.48,4.98, height 3.65
CON4_100_40D72_TH_ST_MALE [mm] "Berg Strip"
  rect 2.5x1.2 hole 0.8: 1(0,0)
  oval 2.5x1.2 hole 0.8: 2(0,-2.54) 3(0,-5.08) 4(0,-7.62)
  round 1.016 on Top Overlay: ""(2.311,0.178)
  silkscreen extent -1.63,-9.02 1.68,1.68, body extent -1.14,-8.76 1.4,1.4, height 8.55
CON4_100_B4B-XH-A_TH_ST [mm] "Connector Header"
  round 1.45 hole 0.91: 1(0,0) 2(2.54,0) 3(5.08,0) 4(7.62,0)
  silkscreen extent -2.77,-3.61 10.16,2.72, body extent -2.4,-3.28 10,2.48, height 8.32
CON6_100_59D78_TH_ST [mm] "Bergstrip"
  oval 1.5x2 hole 0.9: 1(0,0) 2(2.54,0) 3(5,0) 4(7.5,0) 5(10.04,0) 6(12.5,0)
  silkscreen extent -2,-2 14,2, body extent -1.35,-1.24 13.89,1.3, height 8.55
CON10_P106_RJ45_TH_ST [mm] "LAN Connector"
  round 1.5 hole 0.89 paste-2539.97 mask+0: 1(10.145,8.945) 2(8.875,6.405) 3(7.605,8.945) 4(6.335,6.405) 5(5.065,8.945) 6(3.795,6.405) 8(1.255,6.405)
  rect 1.5x1.5 hole 0.89 paste-2539.97 mask+0: 7(2.525,8.945)
  oval 1x1.524 hole 1.5 slot 0.35 at 0 deg: 9(13.3,-2.3) 10(-2,-2.4)
  round 3.18 hole 3.12 unplated paste-2539.97 mask+0: ""(-0.015,0.055) ""(11.415,0.055)
  silkscreen extent -2.79,-10.8 14.1,12.5, body extent -2.53,-3.5 13.73,12.25, height 13.04
CON_690-005-299-043 [mm] "USB MINI-B"
  rect 2.5x0.5 smd: 1(0,6) 2(0,5.2) 3(0,4.4) 4(0,3.6) 5(0,2.8)
  rect 2.5x2 smd: 6(-5.5,9) 6(-5.5,0) 6(0,8.9) 6(0,0)
  silkscreen extent -8.66,-1.6 2.88,10.6, body extent -8.4,-0.55 0.6,9.35, height 3.96
CON_SJ-2504A-SMT-TR_SMD [mm]
  rect 2.3x2 smd: 1(-3.3,3.1) 3(-0.3,3.1)
  rect 2x2.3 smd: 2(6,0)
  rect 2.3x2.1 smd: 4(-3.3,-3.15)
  round 0.9 hole 0.9 unplated: ""(-3.5,0) ""(3.5,0)
  silkscreen extent -6.5,-2.5 5,3.53, body extent -6.5,-4 6.5,4, height 4.01
DFN5045-12_33_212_27X15_SMD_1 [mm] "CASE: DFN5045"
  rect 0.4x1.5 smd: 1(-2,-2.5) 2(-1.2,-2.5) 3(-0.4,-2.5) 4(0.4,-2.5) 5(1.2,-2.5) 6(2,-2.5) 7(2,2.5) 8(1.2,2.5) 9(0.4,2.5) 10(-0.4,2.5) 11(-1.2,2.5) 12(-2,2.5)
  rect 2.7x1.1 smd: 13(1.5,-0.75) 14(1.5,0.75)
  rect 2.6x2.6 smd: 15(-1.75,0)
  silkscreen extent -3.5,-3.5 3.25,3.5, body extent -2.5,-2.36 2.5,2.36, height 0.9
DIO_DO-213AB_SMD [mm] "Diode"
  rect 1.25x3 smd: A(2.625,0) K(-2.625,0)
  silkscreen extent -3.61,-1.9 3.6,1.9, body extent -2.49,-1.25 2.51,1.25, height 2.75
DIO_SMB_DO-214AA [mm] "Diode"
  rect 2.5x2.3 smd: A(-2.35,0) K(2.354,0)
  silkscreen extent -2.56,-2.25 2.75,2.29, body extent -2.56,-1.84 2.84,1.76, height 2.27
DIO_SOD-123 [mm] "DIODE GEN PURP"
  rect 1.2x1.1 smd mask+0.076: A(-1.937,0.006) K(1.923,0.006)
  silkscreen extent -1.38,-0.84 1.44,0.86, body extent -1.92,-0.84 1.92,0.86, height 1.43
DIO_SOD-923 [mm]
  rrect25% 0.49x0.3 smd: A(0.505,0) K(-0.505,0)
  silkscreen extent -1.27,-0.33 1.02,0.33
HCLGA-4_53_137_15X37_SMD [mm]
  rect 0.4x0.95 smd: 1(-0.45,0.675) 2(-0.45,-0.675) 3(0.45,-0.675) 4(0.45,0.675)
  rect 0.35x2.3 smd: 5(-1.225,0) 5(1.225,0)
  rect 1.3x0.35 smd: 5(0,-1.725) 5(0,1.725)
  silkscreen extent -2.35,-2.25 1.75,2.25, body extent -1.5,-2 1.5,2, height 1.02
IND_0805 [mm] "Ferrite Bead"
  rect 1.3x1.5 smd mask+0.076: 1(0.95,0) 2(-0.95,0)
  silkscreen extent -1.83,-0.97 1.83,0.97, body extent -1,-0.63 1,0.62, height 0.5
LED_0805 [mm] "LED"
  rect 1.2x1.2 smd mask+0.076: A(0.889,0) K(-0.889,0)
  silkscreen extent -1.99,-0.89 1.73,0.89, body extent -1.01,-0.62 1.01,0.63, height 1.1
LQFP-48_19.6_393_58X11_SMD [mm] "48LQFP"
  rect 1.7x0.3 smd mask+0.076: 1(-4.238,2.75) 2(-4.238,2.25) 3(-4.238,1.75) 4(-4.238,1.25) 5(-4.238,0.75) 6(-4.238,0.25) 7(-4.238,-0.25) 8(-4.238,-0.75) 9(-4.238,-1.25) 10(-4.238,-1.75) 11(-4.238,-2.25) 12(-4.238,-2.75) 25(4.238,-2.75) 26(4.238,-2.25) 27(4.238,-1.75) 28(4.238,-1.25) 29(4.238,-0.75) 30(4.238,-0.25) 31(4.238,0.25) 32(4.238,0.75) 33(4.238,1.25) 34(4.238,1.75) 35(4.238,2.25) 36(4.238,2.75)
  rect 0.3x1.7 smd mask+0.076: 13(-2.75,-4.238) 14(-2.25,-4.238) 15(-1.75,-4.238) 16(-1.25,-4.238) 17(-0.75,-4.238) 18(-0.25,-4.238) 19(0.25,-4.238) 20(0.75,-4.238) 21(1.25,-4.238) 22(1.75,-4.238) 23(2.25,-4.238) 24(2.75,-4.238) 37(2.75,4.238) 38(2.25,4.238) 39(1.75,4.238) 40(1.25,4.238) 41(0.75,4.238) 42(0.25,4.238) 43(-0.25,4.238) 44(-0.75,4.238) 45(-1.25,4.238) 46(-1.75,4.238) 47(-2.25,4.238) 48(-2.75,4.238)
  silkscreen extent -3.72,-3.15 3.15,3.72, body extent -4.5,-4.5 4.5,4.5, height 1.7
MOUNTING [mm] "MH"
  round 6 hole 3.5: 1(0,0)
  silkscreen extent -3.3,-3.3 3.3,3.3, body extent -3,-2.75 3,2.75, height 4.24
QFN40_19_284_33X9_SMD [mm]
  rrect48% 0.84x0.25 smd: 1(-2.935,2.25) 2(-2.935,1.75) 3(-2.935,1.25) 4(-2.935,0.75) 5(-2.935,0.25) 6(-2.935,-0.25) 7(-2.935,-0.75) 8(-2.935,-1.25) 9(-2.935,-1.75) 10(-2.935,-2.25) 21(2.935,-2.25) 22(2.935,-1.75) 23(2.935,-1.25) 24(2.935,-0.75) 25(2.935,-0.25) 26(2.935,0.25) 27(2.935,0.75) 28(2.935,1.25) 29(2.935,1.75) 30(2.935,2.25)
  rrect48% 0.25x0.84 smd: 11(-2.25,-2.935) 12(-1.75,-2.935) 13(-1.25,-2.935) 14(-0.75,-2.935) 15(-0.25,-2.935) 16(0.25,-2.935) 17(0.75,-2.935) 18(1.25,-2.935) 19(1.75,-2.935) 20(2.25,-2.935) 31(2.25,2.935) 32(1.75,2.935) 33(1.25,2.935) 34(0.75,2.935) 35(0.25,2.935) 36(-0.25,2.935) 37(-0.75,2.935) 38(-1.25,2.935) 39(-1.75,2.935) 40(-2.25,2.935)
  rect 4.1x4.1 smd paste-3: 41(0,0)
  silkscreen extent -4.1,-3.61 3.61,3.61, body extent -3.07,-3 3.07,3.15, height 1.06
QFN100_19.6_669_58X10_SMD [mm] "CASE: QFN"
  rect 1.475x0.254 smd mask+0.076: 1(-7.738,6.127) 2(-7.738,5.627) 3(-7.738,5.127) 4(-7.738,4.627) 5(-7.738,4.127) 6(-7.738,3.627) 7(-7.738,3.127) 8(-7.738,2.627) 9(-7.738,2.127) 10(-7.738,1.627) 11(-7.738,1.127) 12(-7.738,0.627) 13(-7.738,0.127) 14(-7.738,-0.373) 15(-7.738,-0.873) 16(-7.738,-1.373) 17(-7.738,-1.873) 18(-7.738,-2.373) 19(-7.738,-2.873) 20(-7.738,-3.373) 21(-7.738,-3.873) 22(-7.738,-4.373) 23(-7.738,-4.873) 24(-7.738,-5.373) 25(-7.738,-5.873) 51(7.738,-5.873) 52(7.738,-5.373) 53(7.738,-4.873) 54(7.738,-4.373) 55(7.738,-3.873) 56(7.738,-3.373) 57(7.738,-2.873) 58(7.738,-2.373) 59(7.738,-1.873) 60(7.738,-1.373) 61(7.738,-0.873) 62(7.738,-0.373) 63(7.738,0.127) 64(7.738,0.627) 65(7.738,1.127) 66(7.738,1.627) 67(7.738,2.127) 68(7.738,2.627) 69(7.738,3.127) 70(7.738,3.627) 71(7.738,4.127) 72(7.738,4.627) 73(7.738,5.127) 74(7.738,5.627) 75(7.738,6.127)
  rect 0.254x1.475 smd mask+0.076: 26(-6,-7.611) 27(-5.5,-7.611) 28(-5,-7.611) 29(-4.5,-7.611) 30(-4,-7.611) 31(-3.5,-7.611) 32(-3,-7.611) 33(-2.5,-7.611) 34(-2,-7.611) 35(-1.5,-7.611) 36(-1,-7.611) 37(-0.5,-7.611) 38(0,-7.611) 39(0.5,-7.611) 40(1,-7.611) 41(1.5,-7.611) 42(2,-7.611) 43(2.5,-7.611) 44(3,-7.611) 45(3.5,-7.611) 46(4,-7.611) 47(4.5,-7.611) 48(5,-7.611) 49(5.5,-7.611) 50(6,-7.611) 76(6,7.865) 77(5.5,7.865) 78(5,7.865) 79(4.5,7.865) 80(4,7.865) 81(3.5,7.865) 82(3,7.865) 83(2.5,7.865) 84(2,7.865) 85(1.5,7.865) 86(1,7.865) 87(0.5,7.865) 88(0,7.865) 89(-0.5,7.865) 90(-1,7.865) 91(-1.5,7.865) 92(-2,7.865) 93(-2.5,7.865) 94(-3,7.865) 95(-3.5,7.865) 96(-4,7.865) 97(-4.5,7.865) 98(-5,7.865) 99(-5.5,7.865) 100(-6,7.865)
  silkscreen extent -6.65,-6.52 6.65,6.78, body extent -8,-8 8,8.13, height 1.6
RES_0603 [mil] "CASE: 0603"
  rect 35x35 smd mask+3: 1(-27.5,0) 2(27.5,0)
  silkscreen extent -53,-26 54,26, body extent -31,-16 31,16, height 18
RES_0805 [mm] "Resister"
  rect 1.3x1.5 smd mask+0.076: 1(0.95,0) 2(-0.95,0)
  silkscreen extent -1.83,-0.97 1.83,0.97, body extent -1,-0.63 1,0.62, height 0.5
RES_2512 [mil] "CASE: 2512"
  rect 80x125 smd: 1(-125,0) 2(125,0)
  silkscreen extent -178,-74 177,74, body extent -139,-60 136,61, height 19
SOIC16_50_284_25X90_SMT [mm]
  oval 2.5x0.635 smd mask+0.076: 1(-3.25,4.42)
  rect 2.5x0.635 smd mask+0.076: 2(-3.25,3.15) 3(-3.25,1.88) 4(-3.25,0.61) 5(-3.25,-0.66) 6(-3.25,-1.93) 7(-3.25,-3.2) 8(-3.25,-4.47) 9(3.25,-4.47) 10(3.25,-3.2) 11(3.25,-1.93) 12(3.25,-0.66) 13(3.25,0.61) 14(3.25,1.88) 15(3.25,3.15) 16(3.25,4.42)
  silkscreen extent -3.07,-5.3 2.26,5.44, body extent -3.02,-4.97 2.98,4.93, height 1.4
SOT223_3 [mm] "CASE: SOT223"
  rect 2.4x1 smd: 1(-2.875,2.275) 2(-2.875,-0.025) 3(-2.875,-2.325)
  rect 2.4x3.3 smd: 4(2.925,-0.025)
  silkscreen extent -3,-3.38 1.43,3.45, body extent -3.73,-3.28 3.27,3.22, height 1.7
SW_342_SMD [mm] "CASE: SMD"
  rect 2x2 smd: 1(0,0)
  rect 2.15x2.15 smd: 2(-8.5,0)
  silkscreen extent -10.25,-2.06 1.75,2, body extent -7.17,-1.79 -1.17,1.71, height 2.4
TSSOP16_25-59_294_54X14_SMT [mm] "TSOP, 16-Leads, Body 5.00x4.40mm, Pitch 0.65mm"
  oval 1.5x0.45 smd mask+0.076: 1(-2.908,2.273)
  rect 1.5x0.45 smd mask+0.076: 2(-2.908,1.623) 3(-2.908,0.973) 4(-2.908,0.323) 5(-2.908,-0.327) 6(-2.908,-0.977) 7(-2.908,-1.627) 8(-2.908,-2.277) 9(2.942,-2.277) 10(2.942,-1.627) 11(2.942,-0.977) 12(2.942,-0.327) 13(2.942,0.323) 14(2.942,0.973) 15(2.942,1.623) 16(2.942,2.273)
  silkscreen extent -2.97,-2.81 2.51,3.35, body extent -3.2,-2.55 3.2,2.55, height 1.2
VFQFN24_19.6_196_12X32_SMD_1 [mm] "CASE: VQFN24"
  rect 1.5x0.3 smd mask+0.076: 1(-1.25,3.25) 2(-1.25,2.75) 3(-1.25,2.25) 4(-1.25,1.75) 5(-1.25,1.25) 6(-1.25,0.75) 13(3.75,0.75) 14(3.754,1.25) 15(3.754,1.75) 16(3.754,2.25) 17(3.754,2.75) 18(3.754,3.25)
  rect 0.3x1.5 smd mask+0.076: 7(0,-0.5) 8(0.5,-0.5) 9(1,-0.5) 10(1.5,-0.5) 11(2,-0.5) 12(2.5,-0.5) 19(2.5,4.5) 20(2,4.5) 21(1.5,4.5) 22(1,4.5) 23(0.5,4.5) 24(0,4.5)
  rect 2.3x2.3 smd mask+0.076: 25(1.25,2)
  silkscreen extent -1.27,-0.05 3.35,4.37, body extent -0.8,-0.05 3.3,4.05, height 1
VQFN32_19_218_23X9_SMD [mm]
  rrect25% 0.6x0.25 smd mask+0: 1(-2.4,1.75) 2(-2.4,1.25) 3(-2.4,0.75) 4(-2.4,0.25) 5(-2.4,-0.25) 6(-2.4,-0.75) 7(-2.4,-1.25) 8(-2.4,-1.75) 17(2.4,-1.75) 18(2.4,-1.25) 19(2.4,-0.75) 20(2.4,-0.25) 21(2.4,0.25) 22(2.4,0.75) 23(2.4,1.25) 24(2.4,1.75)
  rrect25% 0.25x0.6 smd mask+0: 9(-1.75,-2.4) 10(-1.25,-2.4) 11(-0.75,-2.4) 12(-0.25,-2.4) 13(0.25,-2.4) 14(0.75,-2.4) 15(1.25,-2.4) 16(1.75,-2.4) 25(1.75,2.4) 26(1.25,2.4) 27(0.75,2.4) 28(0.25,2.4) 29(-0.25,2.4) 30(-0.75,2.4) 31(-1.25,2.4) 32(-1.75,2.4)
  rect 3.45x3.45 smd paste-3 mask+0: 33(0,0)
  silkscreen extent -3.39,-2.95 2.95,2.95, body extent -2.56,-2.56 2.56,2.56, height 1.01
XTAL_314_240X47_SMD [mm] "CASE: TH"
  rect 6.096x1.2 smd: 1(0,0) 2(8,0)
  silkscreen extent -3.29,-2.44 11.32,2.57, body extent -2.99,-2.27 10.9,2.41, height 3.05

## Part data
C1 C60: library part CAP_4.7uF-50V-10%-0805, "4.7µF ±10% 50V Ceramic Capacitor X5R 0805 (2012 Metric)", Alternate Part Number-1=NA, Case/Package=0805, Manufacturer=Yageo, Manufacturer Part Number=GRM21BR61H475KE51L, Supplier Part Number-1=CL21A475KBQNNNE, Supplier-1=SIRICOM
C2 C4 C5 C9 C57 C58: library part CAP_0.1uF-50V-10%-0805, "0.1µF ±10% 50V Ceramic Capacitor X7R 0805 (2012 Metric)", Alternate Part Number-1=NA, Case/Package=0805, Manufacturer=Samsung, Manufacturer Part Number=CL21B104KBCNNNC, Supplier Part Number-1=0805B104K500CT, Supplier-1=SIRICOM
C3 C6 C73 C74: library part CAP_30pF-50V-10%-0805, "±10% 50V Ceramic Capacitor C0G, NP0 0805 (2012 Metric)", Alternate Part Number=NA, Case/Package=0805, Manufacturer=KEMET, Manufacturer Part Number=C0805C300K5GAC7800, Supplier Part Number-1="399-17443-1-ND - Cut Tape (CT)", Supplier-1=Digikey
C7 C12 C18 C23 C25 C26 C35 C38 C40 C41 C46 C50 C53 C55 C56 C68 C69 C79 C82 C85 C88: library part CAP_1uF-50V-5%-0805, "1µF ±5% 50V Ceramic Capacitor X7R 0805 (2012 Metric)", Alternate Part Number-1=0805F105M500NT, Case/Package=0805, Manufacturer=Samsung, Manufacturer Part Number=CC0805JKX7R9BB105, Supplier Part Number-1=CL21B105KBFNNNE, Supplier-1=SIRICOM
C8 C14 C16 C31 C32: library part CAP_10nF-50V-10%-0805, "10000pF ±10% 50V Ceramic Capacitor X7R 0805 (2012 Metric)", Alternate Part Number-1=GRM2195C1H103JA01D, Case/Package=0805, Manufacturer=Samsung, Manufacturer Part Number=C0805C103K5RECAUTO, Supplier Part Number-1=0805B103K500CT, Supplier-1=SIRICOM
C10: library part CAP_2nF-50V-10%-0805, "2000pF ±10% 50V Ceramic Capacitor X7R 0805 (2012 Metric)", Alternate Part Number-1=NA, Case/Package=0805, Manufacturer="Samsung Electro-Mechanics", Manufacturer Part Number=CL21B202KBANNNC, Supplier Part Number-1="1276-2471-1-ND - Cut Tape (CT)", Supplier-1=Digikey
C11 C19 C43 C51 C78 C81 C84 C87: library part CAP_10uF-50V-10%-1206, "10µF ±10% 50V Ceramic Capacitor X7R 1206 (3216 Metric)", Alternate Part Number-1=GRT31CR61H106ME01L, Case/Package=1206, Manufacturer=KEMET, Manufacturer Part Number=CL31B106KBHNNNE, Supplier Part Number-1=CC1206KKX5R9BB106, Supplier-1=SIRICOM
C13 C17 C22 C24 C27 C28 C29 C30 C33 C36 C37 C39 C42 C44 C45 C47 C52 C54: library part CAP_0.1uF-50V-5%-0805, "0.1µF ±5% 50V Ceramic Capacitor X7R 0805 (2012 Metric)", Alternate Part Number-1=0805B104M500, Case/Package=0805, Manufacturer="AVX Corporation", Manufacturer Part Number=08055C104JAT4A, Supplier Part Number-1=0805B104J500CT, Supplier-1=SIRICOM
C15 C20: library part CAP_20pF-50V-10%-0805, "±10% 50V Ceramic Capacitor C0G, NP0 0805 (2012 Metric)", Alternate Part Number-1=NA, Case/Package=0805, Manufacturer="AVX Corporation", Manufacturer Part Number=08055A200KAT2A, Supplier Part Number-1="478-11887-1-ND - Cut Tape (CT)", Supplier-1=Digikey
C21: library part CAP_10nF-1KV-10%-RAD-TH, "10000pF ±10% 1000V (1kV) Ceramic Capacitor X7R Radial", Alternate Part Number-1=NA, Case/Package=TH, Manufacturer=Yageo, Manufacturer Part Number=RDER73A103K2K1H03B, Supplier Part Number-1=RDER73A103K2K1H03B, Supplier-1="SP ROAD"
C34 C91: library part CAP_22nF-50V-10%-0805, "0.022µF ±10% 50V Ceramic Capacitor X7R 0805 (2012 Metric)", Alternate Part Number-1=NA, Case/Package=0805, Manufacturer="Samsung Electro-Mechanics", Manufacturer Part Number=CL21B223KBANNNC, Supplier Part Number-1="1276-1081-1-ND - Cut Tape (CT)", Supplier-1=Digikey
C48 C49: library part CAP_150pF-50V-10%-0805, "150pF ±10% 50V Ceramic Capacitor C0G, NP0 0805 (2012 Metric)", Alternate Part Number-1=NA, Case/Package=0805, Manufacturer="AVX Corporation", Manufacturer Part Number=08055A151KAT2A, Supplier Part Number-1="478-10501-1-ND - Cut Tape (CT)", Supplier-1=Digikey
C59 C61 C62 C63 C64 C65 C70 C71 C72 C80 C83 C86 C89: library part CAP_0.1uF-50V-20%-0805, "0.1µF ±20% 50V Ceramic Capacitor X7R 0805 (2012 Metric)", Alternate Part Number-1=NA, Case/Package=0805, Manufacturer="Samsung Electro-Mechanics", Manufacturer Part Number=CL21B104MBCNNNC, Supplier Part Number-1=0805B104K500CT, Supplier-1=SIRICOM
C66 C67: library part CAP_2.2uF-25V-10%-0805, "2.2µF ±10% 25V Ceramic Capacitor X7R 0805 (2012 Metric)", Alternate Part Number-1=NA, Case/Package=0805, Manufacturer=KEMET, Manufacturer Part Number=CL21B225KAFNFNE, Supplier Part Number-1=CL21A225KAFNNNE, Supplier-1=SIRICOM
C75 C76 C77 C90: library part CAP-P_100uF-50V-20%-RAD, "100µF 50V Aluminum Polymer Capacitor Radial, Can - SMD 28mOhm 4000 Hrs @ 125°C", Alternate Part Number-1=VEU101M1HTR-1010, Case/Package=Radial-SMD, Manufacturer=Nichicon, Manufacturer Part Number=GYA1H101MCQ1GS, Supplier Part Number-1=GYA1H101MCQ1GS, Supplier-1="SP ROAD"
D1 D2 D3 D4: library part DIO-T_3.3V-8.8V-SOD923, "8.8V Clamp 5A (8/20µs) Ipp Tvs Diode Surface Mount SOD-923", Alternate Part Number-1=NA, Case/Package=SOD923, Manufacturer="Micro Commercial Co", Supplier Part Number-1="ESD3V3D9-TPMSCT-ND - Cut Tape (CT)", Manufacturer Part Number=ESD3V3D9-TP, Supplier-1=Digikey
D5 D7: library part DIO-S_445mV-30V-2A-SMB, "Diode Schottky 30V 2A Surface Mount SMB", Alternate Part Number-1=NA, Case/Package=SMB, Manufacturer="ON Semiconductor", Manufacturer Part Number=MBRS130LT3G, Supplier Part Number-1=MBRS130LT3G, Supplier-1=ARROW
D6: library part DIO-Z_3.3V-500mW-SOD123, "Zener Diode 3.3V 500mW ±6% Surface Mount SOD-123", Alternate Part Number-1=NA, Case/Package=SOD-123, Manufacturer="Diodes Incorporated", Supplier Part Number-1=BZT52C3V3-FDICT-ND, Manufacturer Part Number=BZT52C3V3-7-F, Supplier-1=Digikey
D8: library part DIO-Z_1.8V-500mW-DO213AA, "Zener Diode 1.8V 500mW ±5% Surface Mount DO-213AA"
DS1 DS2: library part LED_RED-2V-20mA-0805, "Red 631nm LED Indication - Discrete 2V 0805 (2012 Metric)", Alternate Part Number-1=NA, Case/Package=0805, Manufacturer="Vishay Lite-On", Manufacturer Part Number=LTST-C171KRKT, Supplier Part Number-1=LTST-C171KRKT, Supplier-1="SP ROAD"
FB1 FB2 FB3 FB4: library part FB_1K-100MHZ-1.6A-0805, "1 kOhms @ 100MHz 1 Power Line Ferrite Bead 0805 (2012 Metric) 1.6A", Alternate Part Number-1=NA, Case/Package=0805, Manufacturer=Laird, Manufacturer Part Number=BLM21SP102SH1D, Supplier Part Number-1=ACMS201209A102, Supplier-1=SIRICOM
J1 J5: library part CON_USB2.0-MINIB-SMD, "USB - mini B USB 2.0 Receptacle Connector 5 Position Surface Mount, Right Angle", Alternate Part Number-1=NA, Case/Package=USB-MINI-B, Manufacturer=EDAC, Manufacturer Part Number=690-005-299-043, Supplier Part Number-1=C105424, Supplier-1=LCSC
J2: library part CON-BS-SKT_6X1-100-ST-TH, "6 Pins, 1 Row 2.54mm Pitch, Straight bergstrip, Female", Alternate Part Number-1=NA, Case/Package=TH-CON, Manufacturer=Molex, Manufacturer Part Number=22-10-2061, Supplier Part Number-1=NA, Supplier-1="SP ROAD"
J4 J8: library part CON-PLG_2X1-100-ST-TH, "2 Pins, 1 Row 2.54mm Pitch, Straight Connector, male", Alternate Part Number-1=NA, Case/Package=TH-CON, Crimp Part Number=ASXHSXH22K51, Manufacturer=JST, Mating Part Number=XHP-2, Manufacturer Part Number=B2B-XH-A(LF)(SN), Supplier Part Number-1=B2B-XH-A(LF)(SN), Supplier-1="SP ROAD"
J6: library part CON-PLG_4X1-50-RA-TH, "4 Pins, 1 Row 1.25mm Pitch, right angle Connector, male", Alternate Part Number-1=NA, Case/Package=TH-CON, Crimp Part Number=653153128130, Manufacturer=JST, Manufacturer Part Number=653004117322, Mating Part Number=653004113322, Supplier Part Number-1=653004117322, Supplier-1=WURTH
J7: library part CON-PLG-STEREO_4X1-100-RA-SMD, "2.50mm (0.094\", 3/32\", Sub Mini, Miniature) - Headphone Phone Jack Stereo (4 Conductor, TRRS) Connector Solder", Alternate Part Number-1=NA, Case/Package=SMD, Manufacturer="CUI Devices", Manufacturer Part Number=SJ-2504A-SMT-TR, Supplier Part Number-1="CP-SJ-2504A-SMT-CT-ND - Cut Tape (CT)", Supplier-1=Digikey
J9 J10: library part CON-PLG_4X1-100-ST-TH, "4 Pins, 1 Row 2.54mm Pitch, straight Connector, male", Alternate Part Number-1=NA, Case/Package=TH-CON, Crimp Part Number=ASXHSXH22K51, Manufacturer="Wurth Electronics", Mating Part Number=XHP-4, Manufacturer Part Number=B4B-XH-A(LF)(SN), Supplier Part Number-1=B4B-XH-A(LF)(SN), Supplier-1=LCSC
J11: library part CON-TB_3X1-100-ST-TH, "3 Pins, 1 Row 2.54mm Pitch, straight Connector, male", Alternate Part Number-1=NA, Case/Package=TH-CON, Manufacturer="Phoenix Contact", Manufacturer Part Number=1725669, Supplier Part Number-1=1725669, Supplier-1="SP ROAD"
J12: library part CON-BS-PLG_4X1-100-ST-TH, "4 Pins, 1 Row 2.54mm Pitch, Straight bergstrip, Male", Alternate Part Number-1=NA, Case/Package=TH-CON, Manufacturer=NA, Manufacturer Part Number=NA, Supplier Part Number-1=NA, Supplier-1="SP ROAD"
MH1 MH2 MH3 MH4: library part MH_3.5H_6D, Alternate Part Number-1=NA, Case/Package=TH, Manufacturer=NA, Manufacturer Part Number=NA, Supplier Part Number-1=NA, Supplier-1=NA
Q1 Q2: library part MOSFET-N_60V-14.8A-V-DFN5045-12, "Mosfet Array 4 N-Channel 14.8A (Ta) Surface Mount V-DFN5045-12", Alternate Part Number-1=DMHT3006LFJ-13, Case/Package=DFN5045-12, Manufacturer="ON Semiconductor", Supplier Part Number-1=C460986, Manufacturer Part Number=DMHT6016LFJ-13, Supplier-1=LCSC
R1 R6 R9 R11: library part RES_10K-0.125W-1%-0805, "10 kOhms ±1% 0.125W, 1/8W Chip Resistor 0805 (2012 Metric) Automotive AEC-Q200 Thick Film", Alternate Part Number-1=WR08X1002FTL, Case/Package=0805, Manufacturer=CTS, Manufacturer Part Number=WR08X1002FTL, Supplier Part Number-1=WR08X1002FTL, Supplier-1=SIRICOM
R2: library part RES_1.5K-0.125W-1%-0805, "1.5 kOhms ±1% 0.125W, 1/8W Chip Resistor 0805 (2012 Metric) Thick Film", Alternate Part Number-1=NA, Case/Package=0805, Manufacturer="TE Connectivity Passive Product", Manufacturer Part Number=CRG0805F1K5, Supplier Part Number-1=NA, Supplier-1=SIRICOM
R3 R4 R27 R47 R48: library part RES_100K-0.1W-1%-0603, "100 kOhms ±1% 0.1W, 1/10W Chip Resistor 0603 (1608 Metric) Automotive AEC-Q200 Thick Film", Alternate Part Number-1=NA, Case/Package=0603, Manufacturer="Stackpole Electronics", Manufacturer Part Number=RMCF0603FT100K, Supplier Part Number-1=RMCF0603FT100K, Supplier-1=Arrow
R5 R7 R14 R35: library part RES_3.3K-0.1W-1%-0603, "3.3 kOhms ±1% 0.1W, 1/10W Chip Resistor 0603 (1608 Metric) Automotive AEC-Q200 Thick Film", Alternate Part Number-1=0603WAF3301T5E, Case/Package=0603, Manufacturer=Wilson, Manufacturer Part Number=WR06X3301FTL, Supplier Part Number-1=WR06X3301FTL, Supplier-1=SIRICOM
R8 R15 R16 R17 R19 R21 R22 R23 R24 R25 R26 R32 R33 R36 R37 R38 R40 R42 R43 R44 R45 R46: library part RES_10K-0.1W-1%-0603, "10 kOhms ±1% 0.1W, 1/10W Chip Resistor 0603 (1608 Metric) Automotive AEC-Q200 Thick Film", Alternate Part Number-1=0603WAJ0103T5E, Case/Package=0603, Manufacturer=Walsin, Manufacturer Part Number=WR06X1002FTL, Supplier Part Number-1=WR06X1002FTL, Supplier-1=SIRICOM
R10: library part RES_1M-0.125W-1%-0805, "1 MOhms ±1% 0.125W, 1/8W Chip Resistor 0805 (2012 Metric) Automotive AEC-Q200 Thick Film", Alternate Part Number-1=0805W8F1004T5E, Case/Package=0805, Manufacturer=Walsin, Manufacturer Part Number=WR08X1004FTL, Supplier Part Number-1=WR08X1004FTL, Supplier-1=SIRICOM
R12: library part RES_6.49K-0.125W-1%-0805, "6.49 kOhms ±1% 0.125W, 1/8W Chip Resistor 0805 (2012 Metric) Moisture Resistant Thick Film", Alternate Part Number-1=NA, Case/Package=0805, Manufacturer="Stackpole Electronics", Manufacturer Part Number=RC0805FR-076K49L, Supplier Part Number-1=WRO8X6491FTL, Supplier-1=SIRICOM
R13 R34: library part RES_2K2-0.1W-5%-0603, "2.2 kOhms ±5% 0.1W, 1/10W Chip Resistor 0603 (1608 Metric) Automotive AEC-Q200 Thick Film", Alternate Part Number-1=WR06X2201FTL, Case/Package=0603, Manufacturer="Stackpole Electronics", Manufacturer Part Number=ERJ-3GEYJ222V, Supplier Part Number-1=WR06X2201FTL, Supplier-1=SIRICOM
R18 R39: library part RES_33K-0.125W-1%-0805, "Thick Film Resistors - SMD 33KOhms 1/8W 150V33 kOhms ±1% 0.125W, 1/8W Chip Resistor 0805 (2012 Metric) Thick Film", Alternate Part Number-1=NA, Case/Package=0805, Manufacturer="Vishay BCcomponents", Manufacturer Part Number=CRG0805F33K, Supplier Part Number-1=WR08X3302FTL, Supplier-1=SIRICOM
R20 R41: library part RES_50mOhm-2W-1%-2512, "50 mOhms ±1% 2W Chip Resistor 2512 (6432 Metric) Automotive AEC-Q200, Current Sense, Moisture Resistant Metal Element", Alternate Part Number-1=PMR100HZPFU5L00, Case/Package=2512, Manufacturer=Yageo, Manufacturer Part Number=PA2512FKF7W0R05E, Supplier Part Number-1=LR2512-22R060F1, Supplier-1=SIRICOM
R28 R29: library part RES_1K-0.1W-1%-0603, "1 kOhms ±1% 0.1W, 1/10W Chip Resistor 0603 (1608 Metric) Automotive AEC-Q200 Thick Film", Alternate Part Number-1=0603WAF1001T5E, Case/Package=0603, Manufacturer=Walsin, Manufacturer Part Number=WR06X1001FTL, Supplier Part Number-1=WR06X1001FTL, Supplier-1=SIRICOM
R30 R31: library part RES_51.1R-0.1W-1%-0603, "51.1 Ohms ±1% 0.1W, 1/10W Chip Resistor 0603 (1608 Metric) Thick Film", Alternate Part Number-1=NA, Case/Package=0603, Manufacturer="Vishay Dale", Manufacturer Part Number=CRCW060351R1FKEAC, Supplier Part Number-1="541-5468-1-ND - Cut Tape (CT)", Supplier-1=Digikey
S: library part CON-SKT-RJ_8C8P-RA-TH, "8 Pins, 2 Row 2.54mm Pitch, right angle Connector, male", Alternate Part Number-1=NA, Case/Package=TH-CON, Manufacturer=Assmann, Manufacturer Part Number=A-2004-2-4-LPS-N-R, Supplier Part Number-1=A-2004-2-4-LPS-N-R, Supplier-1="SP ROAD"
SW1 SW2 SW3: library part SW1_RS-282G05A3-SMRT-SMD, "Tactile Switch SPST-NO Top Actuated Surface Mount", Alternate Part Number-1=NA, Case/Package=SMD, Manufacturer="ITT C&K", Manufacturer Part Number=RS-282G05A3-SMRT, Supplier Part Number-1=RS-282G05A3-SMRT, Supplier-1="SP ROAD"
U1: library part IC_STM32F103C8T6, "ARM® Cortex®-M3 STM32F1 Microcontroller IC 32-Bit 72MHz 64KB (64K x 8) FLASH 48-LQFP (7x7)", Alternate Part Number-1=NA, Case/Package=LQFP48, Manufacturer=STMicroelectronics, Manufacturer Part Number=STM32F103C8T6, Supplier Part Number-1=STM32F103C8T6, Supplier-1=LCSC
U2: library part IC_DP83826IRHBR, "Ethernet ICs Low latency 10/100-Mbps PHY, MII interface and enhanced mode with an industrial temperature range 32-VQFN -40 to 85", Alternate Part Number-1=NA, Case/Package=32-VQFN, Manufacturer="Texas Instruments", Supplier Part Number-1=595-DP83826IRHBR, Manufacturer Part Number=DP83826IRHBR, Supplier-1=Mouser
U3 U8: library part IC_DRV8701ERGET, "Motor Driver Power MOSFET Parallel 24-VQFN (4x4)", Alternate Part Number-1=NA, Case/Package=VFQFN24, Manufacturer="Texas Instruments", Manufacturer Part Number=DRV8701ERGET, Supplier Part Number-1=DRV8701ERGET, Supplier-1=ARROW
U4: library part IC_CH340C, "USB Bridge, USB to UART USB 2.0 UART Interface", Alternate Part Number-1=NA, Case/Package=SOIC16, Manufacturer=Olimex, Supplier Part Number-1=C84681, Manufacturer Part Number=CH340C, Supplier-1=LCSC
U5: library part IC_ADS122C04IPW, "24 Bit Analog to Digital Converter 4 Input 1 Sigma-Delta 16-TSSOP", Alternate Part Number-1=NA, Case/Package=TSSOP16, Manufacturer="Texas Instruments", Manufacturer Part Number=ADS122C04IPW, Supplier Part Number-1=ADS122C04IPW, Supplier-1=MOUSER
U6: library part IC_CS43L22, "Audio D/A Converter ICs Low Power Stereo DAC w/ClassD Spkr Driver", Alternate Part Number-1=NA, Case/Package=QFN-40, Manufacturer="Cirrus Logic", Supplier Part Number-1=777-CS43L22-CNZ, Manufacturer Part Number=CS43L22-CNZ, Supplier-1=Mouser
U7: library part IC_IMP34DT05TR, "MEMS Microphones AUTO & INDUSTRIAL SENSORS", Alternate Part Number-1=NA, Case/Package=HCLGA-4, Manufacturer=STMicroelectronics, Supplier Part Number-1=511-IMP34DT05TR, Manufacturer Part Number=IMP34DT05TR, Supplier-1=Mouser
U9: library part IC_STM32F407VGT6, "ARM® Cortex®-M4 STM32F4 Microcontroller IC 32-Bit 168MHz 1MB (1M x 8) FLASH 100-LQFP (14x14)", Alternate Part Number-1=STM32F407VET6, Case/Package=LQFP100, Manufacturer=STMicroelectronics, Manufacturer Part Number=STM32F407VGT6, Supplier Part Number-1=STM32F407VGT6, Supplier-1=ARROW
U10: library part REG_15V-3.3V-0.9A-12W-SOT223, "Linear Voltage Regulator IC 1 Output 800mA SOT-223", Alternate Part Number-1=NA, Case/Package=SOT223, Manufacturer=STMicroelectronics, Manufacturer Part Number=LD1117S33CTR, Supplier Part Number-1=LD1117S33CTR, Supplier-1="SP ROAD"
U11: library part REG_15V-1.8V-0.8A-1.4W-SOT223, "LDO Voltage Regulators 1.8V 0.8A Positive", Alternate Part Number-1=NA, Case/Package=SOT-223-3, Manufacturer=STMicroelectronics, Supplier Part Number-1=511-LD1117S18-TR, Manufacturer Part Number=LD1117S18TR, Supplier-1=Mouser
X1 X2: library part XTAL_8MHZ-ECS-80-32-5PX-SMD, "8MHz ±30ppm Crystal 32pF 60 Ohms HC-49/US", Alternate Part Number-1=NA, Case/Package=SMD/SMT, Manufacturer="Fox Electronics", Manufacturer Part Number=ECS-80-32-5PX-TR, Supplier Part Number-1=ECS-80-32-5PX-TR, Supplier-1="SP ROAD"
Y1: library part XTAL_25Mhz-FOXSDLF/250F-20, "25MHz ±30ppm Crystal 20pF 30 Ohms HC-49/US", Alternate Part Number-1=NA, Case/Package=SMD, Manufacturer=Abracon, Manufacturer Part Number=FOXSDLF/250F-20, Supplier Part Number-1=FOXSDLF/250F-20, Supplier-1=MOUSER

## Via types
v1: diameter 0.45, hole 0.25, Top Layer to Bottom Layer, 268 vias
v2: diameter 1.27, hole 0.711, Top Layer to Bottom Layer, 82 vias
v3: diameter 0.8, hole 0.4, Top Layer to Bottom Layer, 63 vias

## Nets (pads, with @x,y where several pads share a name; then routed paths per layer and width w, separated by ;. In a path a pad name is that pad's centre, name@x,y a point inside that pad or via, vN(x,y) a via of type N, cw(c..) or ccw(c..) an arc to the next point about the centre after c; other vN are vias at no path point)
+1V8: C35.2 C36.2 C84.2 C85.2 C86.2 D8.K FB3.1 U6.34 U11.2 U11.4 | length 3.8
  Top Layer w0.254: v1(13.594,23.713) 13.631,23.676 14.194,23.676 14.343,23.527 U6.34@14.343,23.015
  Bottom Layer w0.254: v1(13.594,23.713) 13.594,22.823 C36.2@13.843,22.574 ; C35.2@15.748,22.574 16.161,22.987 v1(16.764,22.987)
  other v1: 43.053,2.159 43.053,2.819 43.053,3.429 43.053,4.089 43.053,4.717